# EAGLE board frontplatine_v0.2_140201 (EAGLE 6.3), part 1 of 2
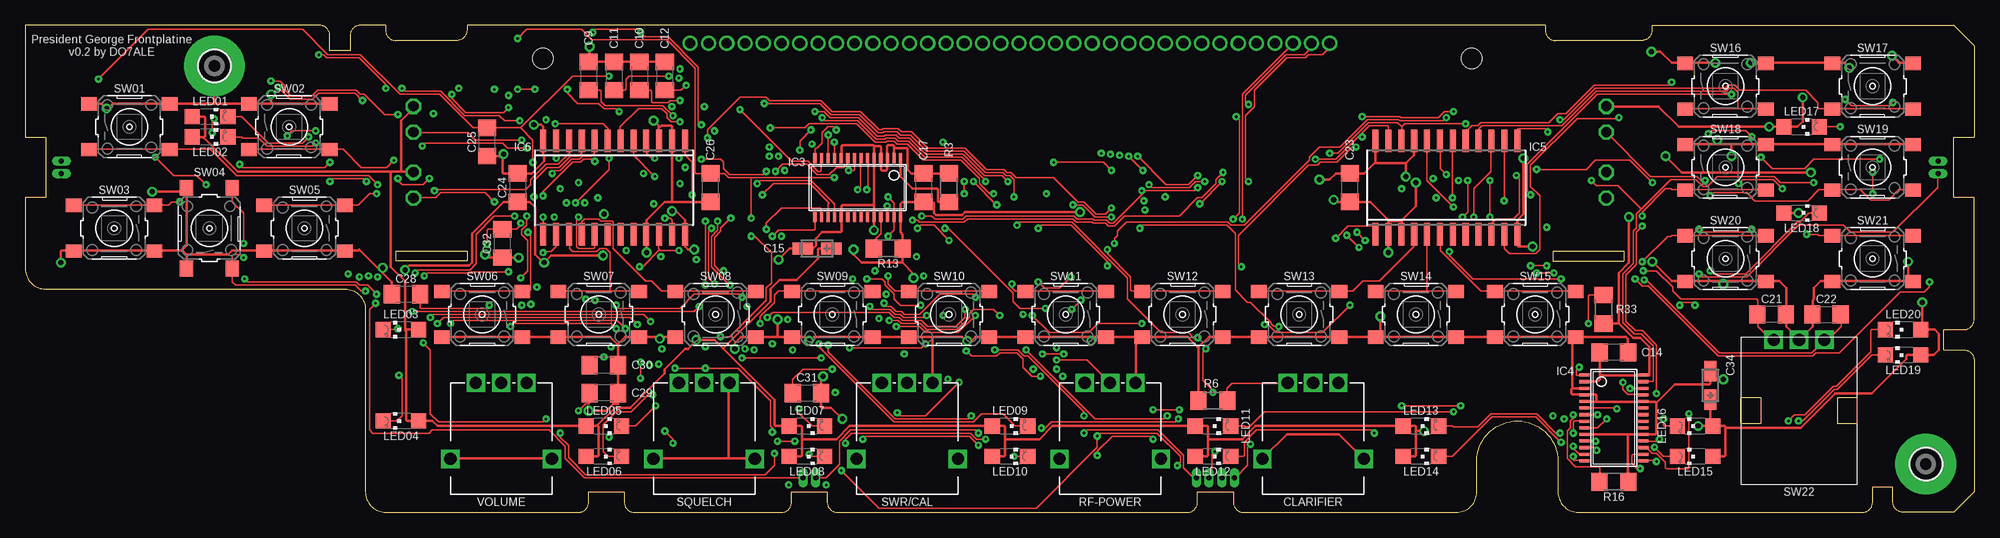
[diagram p0: board, top side]
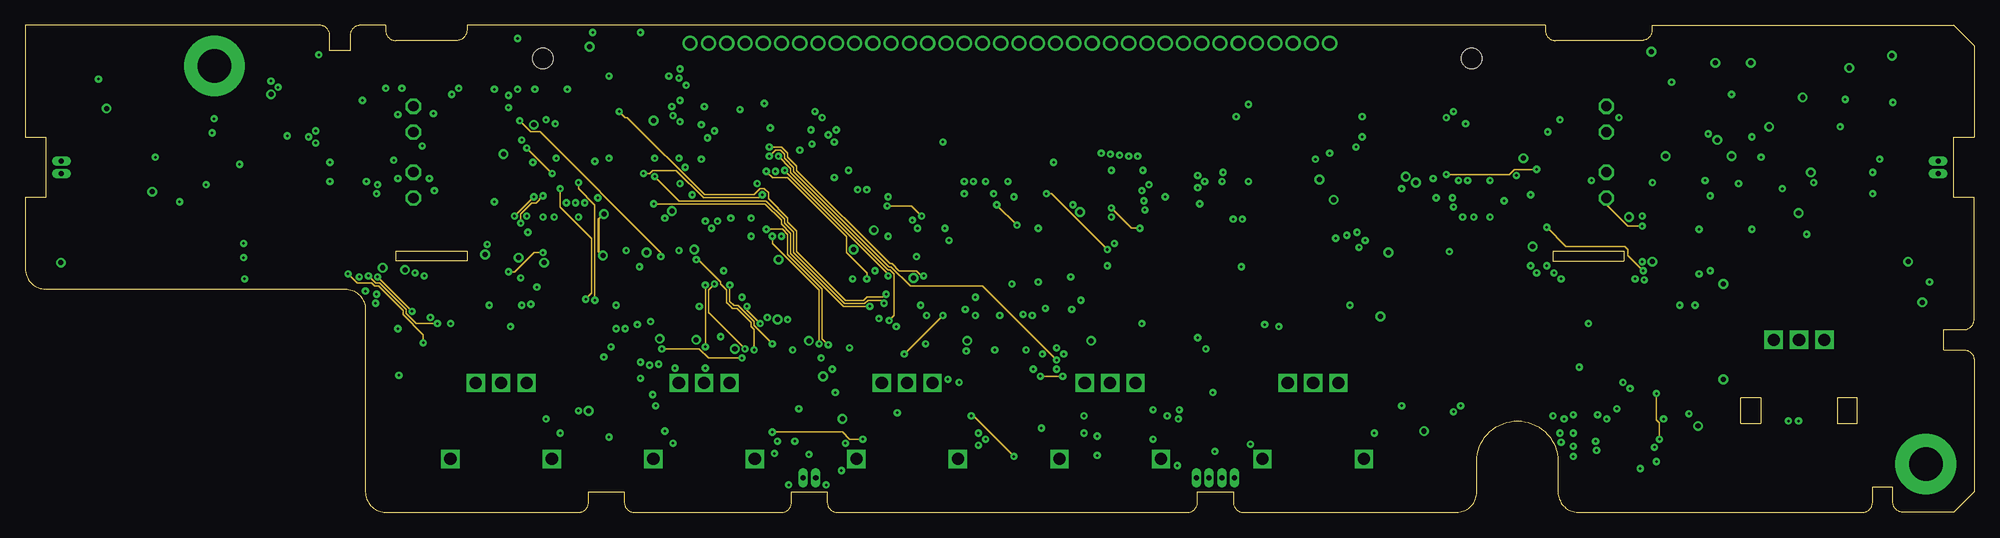
[diagram p1: board, inner layer Route2]
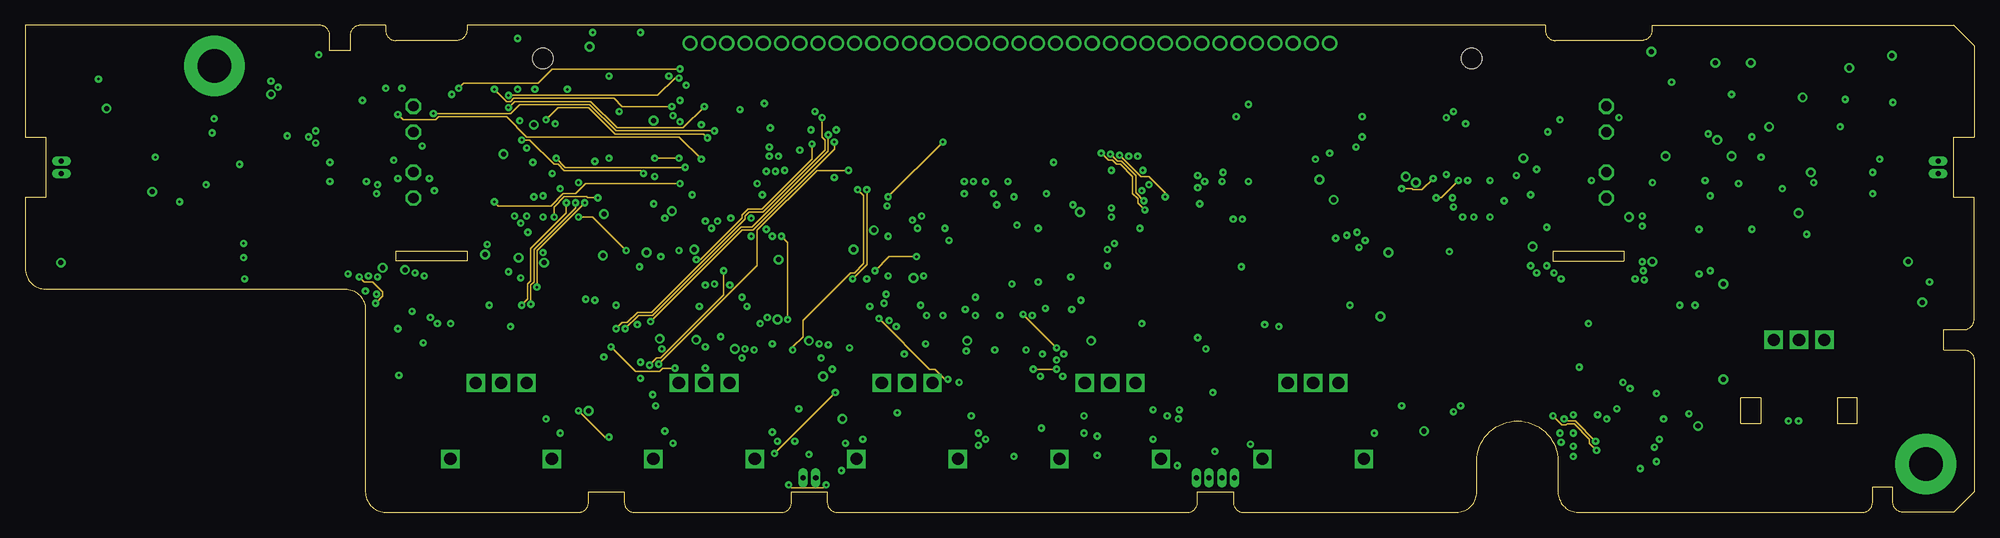
[diagram p2: board, inner layer Route3]
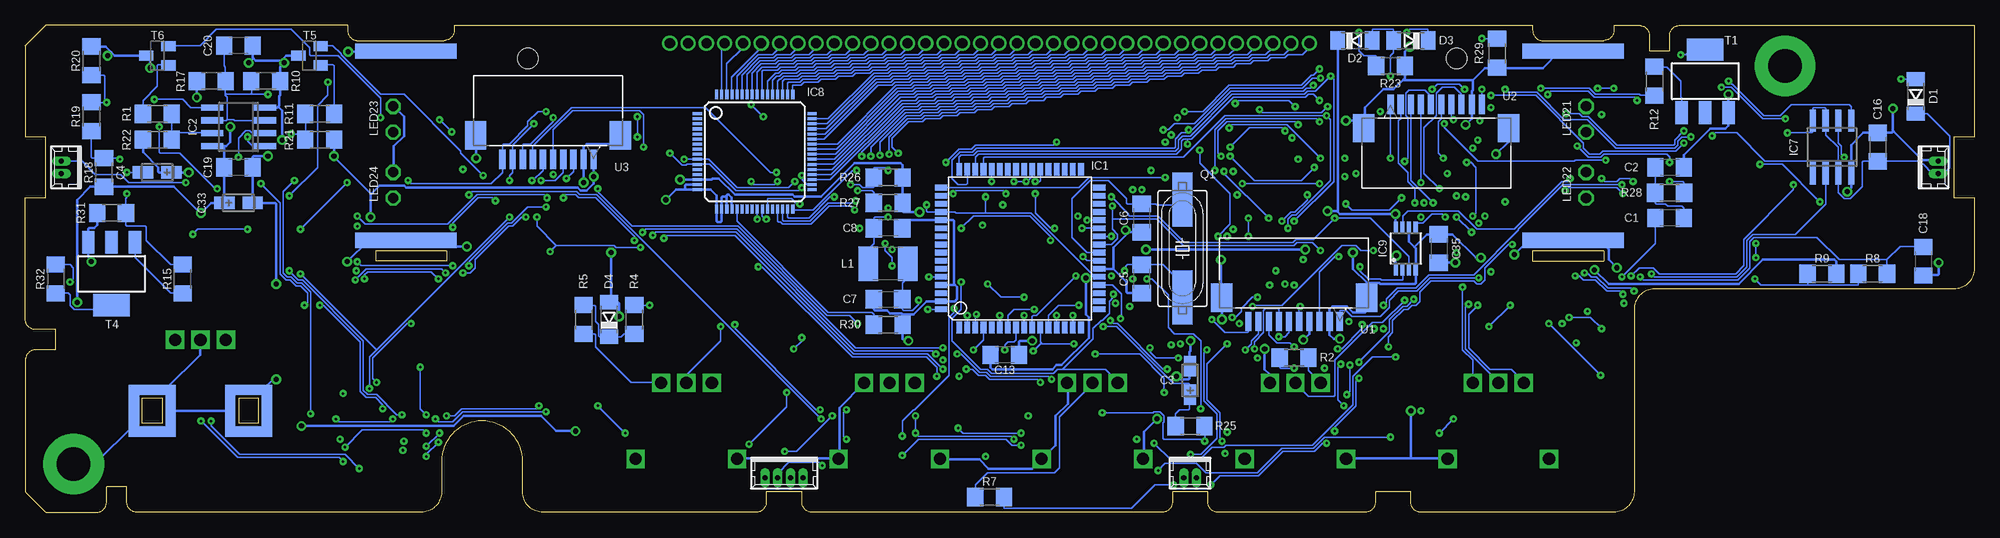
[diagram p3: board, bottom side, seen from below]

Size 192 x 48 mm. Coordinates in mm from the lower left corner, seen from the top.
Outline: 150.75,46.5 159.25,46.5 arc90 160.25,47.5 160.25,48
Outline: 43.5,48 149.75,48 149.75,47.5 arc90 150.76,46.5
Outline: 35.5,48 33,48 arc90 32,47 32,45.5 30,45.5 30,47 arc90 29,48 0,48 0,37 2,37 2,31 0,31 0,24 arc90 2,22 31.5,22 arc-90 33.5,20 33.5,2 arc90 35.5,0 54.5,0 arc90 55.5,1 55.5,2 59,2 59,1 arc90 60,0 74.5,0 arc90 75.5,1 75.5,2 79,2 79,1 arc90 80,0 114.5,0 arc90 115.5,1 115.5,2 119,2 119,1 arc90 120,0 141,0 arc90 143,2 143,5 arc-90 147,9 arc-90 151,5 151,2 arc90 153,0 181,0 arc90 182,1 182,2.5 184,2.5 184,1 arc90 185,0 190,0 192,2 192,15 arc90 191,16 189,16 189,18 191,18 arc90 192,19 192,31 190,31 190,37 192,37 192,46 190,48 160.25,48
Outline: 43.5,48 43.5,47.5 arc-90 42.5,46.5 36.5,46.5 arc-90 35.5,47.5 35.5,48
Copper layers (1*2+3*4+5*6+7*16): Top 0.035mm / dielectric 0.2mm / Route2 0.035mm / dielectric 0.15mm / Route3 0.035mm / dielectric 0.2mm / Route4 0.035mm / dielectric 0.15mm / Route5 0.035mm / dielectric 0.2mm / Route6 0.035mm / dielectric 0.15mm / Route7 0.035mm / dielectric 0.2mm / Bottom 0.035mm
Design rules "Eagle_WEdirekt_125_check": minimum track width 5mil, minimum drill 0.2mm, track to track 5mil, track to pad 5mil, pad to pad 7mil, via to via 5mil, smd to smd 7mil, copper to edge 12mil, drill to drill 24mil, minimum pad ring 9mil, minimum via ring 9mil, stop-mask expansion 2mil, vias tented up to drill 0mil, thermal gap 12mil
Net classes: 0 default: width 0.125 mm, drill 0.25 mm; 1 GND: width 0.25 mm, drill 0.5 mm; 2 SUPPLY LED: width 0.25 mm, drill 0.5 mm; 3 LCD: width 0.075 mm, drill 0.25 mm
tKeepout: area 184,8.5 to 187,11.5; area 160.5,11 to 163.5,14; area 163,0 to 166,3; area 37.5,3.5 to 40.5,6.5; area 149.5,11 to 152.5,14; area 92,11 to 95,14; area 36.5,11 to 39.5,14
bKeepout: area 147,18.5 to 151,24.5
tRestrict: area 190,37 to 192,40; area 73.5,0 to 81,2.3; area 53.5,0 to 61,2.3; area 113.5,0 to 121,2.3; area 0,37 to 2,40
bRestrict: area 190,37 to 192,40; area 73.5,0 to 81,2.3; area 53.5,0 to 61,2.3; area 113.5,0 to 121,2.3; area 0,37 to 2,40; area 136,8.5 to 140,14.5; area 125.5,15 to 129.5,21; area 106,2 to 110,8; area 86,2 to 90,8; area 56,8.5 to 60,14.5; area 46,2 to 50,8
vRestrict: area 190,37 to 192,40; area 73.5,0 to 81,2.3; area 53.5,0 to 61,2.3; area 113.5,0 to 121,2.3; area 0,37 to 2,40

## Footprints (pad centres in the part's own frame; a part is rotated, then mirrored left to right if it is on the bottom)
C1206 = smd 1.6 x 1.8: 1 -1.4,0; 2 1.4,0
CT3216 = smd 2 x 1.2: + -1.4,0; - 1.4,0
POTI = drill 1.2 square: 1 -2.5,-7.5; 2 0,-7.5; 3 2.5,-7.5; 4 -5,0; 5 5,0
SOD80C = smd 1.4 x 1.8: A 1.7,0; C -1.7,0
DISPLAY = drill 1 octagon: A1 1.73,15.27; A2 1.73,8.77; A3 119.27,15.27; A4 119.27,8.77; K1 1.73,12.73; K2 1.73,6.23; K3 119.27,12.73; K4 119.27,6.23 | drill 1: COM1 88.4,21.5; COM2 90.2,21.5; COM3 92,21.5; SEG01 29,21.5; SEG02 30.8,21.5; SEG03 32.6,21.5; SEG04 34.4,21.5; SEG05 36.2,21.5; SEG06 38,21.5; SEG07 39.8,21.5; SEG08 41.6,21.5; SEG09 43.4,21.5; SEG10 45.2,21.5; SEG11 47,21.5; SEG12 48.8,21.5; SEG13 50.6,21.5; SEG14 52.4,21.5; SEG15 54.2,21.5; SEG16 56,21.5; SEG17 57.8,21.5; SEG18 59.6,21.5; SEG19 61.4,21.5; SEG20 63.2,21.5; SEG21 65,21.5; SEG22 66.8,21.5; SEG23 68.6,21.5; SEG24 70.4,21.5; SEG25 72.2,21.5; SEG26 74,21.5; SEG27 75.8,21.5; SEG28 77.6,21.5; SEG29 79.4,21.5; SEG30 81.2,21.5; SEG31 83,21.5; SEG32 84.8,21.5; SEG33 86.6,21.5 | smd 10 x 1.5 bottom: GND@0 118,2.055; GND@3 3,2.055; GND@6 3,20.695; GND@7 118,20.695 | hole 2: 14.5,20; 106,20
TQFP64 = smd 1.194 x 0.559: 1 -7.8,6; 2 -7.8,5.2; 3 -7.8,4.4; 4 -7.8,3.6; 5 -7.8,2.8; 6 -7.8,2; 7 -7.8,1.2; 8 -7.8,0.4; 9 -7.8,-0.4; 10 -7.8,-1.2; 11 -7.8,-2; 12 -7.8,-2.8; 13 -7.8,-3.6; 14 -7.8,-4.4; 15 -7.8,-5.2; 16 -7.8,-6; 33 7.8,-6; 34 7.8,-5.2; 35 7.8,-4.4; 36 7.8,-3.6; 37 7.8,-2.8; 38 7.8,-2; 39 7.8,-1.2; 40 7.8,-0.4; 41 7.8,0.4; 42 7.8,1.2; 43 7.8,2; 44 7.8,2.8; 45 7.8,3.6; 46 7.8,4.4; 47 7.8,5.2; 48 7.8,6 | smd 0.559 x 1.194: 17 -6,-7.8; 18 -5.2,-7.8; 19 -4.4,-7.8; 20 -3.6,-7.8; 21 -2.8,-7.8; 22 -2,-7.8; 23 -1.2,-7.8; 24 -0.4,-7.8; 25 0.4,-7.8; 26 1.2,-7.8; 27 2,-7.8; 28 2.8,-7.8; 29 3.6,-7.8; 30 4.4,-7.8; 31 5.2,-7.8; 32 6,-7.8; 49 6,7.8; 50 5.2,7.8; 51 4.4,7.8; 52 3.6,7.8; 53 2.8,7.8; 54 2,7.8; 55 1.2,7.8; 56 0.4,7.8; 57 -0.4,7.8; 58 -1.2,7.8; 59 -2,7.8; 60 -2.8,7.8; 61 -3.6,7.8; 62 -4.4,7.8; 63 -5.2,7.8; 64 -6,7.8
SO08 = smd 0.6 x 2.2: 1 -1.905,-2.6; 2 -0.635,-2.6; 3 0.635,-2.6; 4 1.905,-2.6; 5 1.905,2.6; 6 0.635,2.6; 7 -0.635,2.6; 8 -1.905,2.6
TSSOP28 = smd 0.305 x 0.991: 1 -4.225,-2.918; 2 -3.575,-2.918; 3 -2.925,-2.918; 4 -2.275,-2.918; 5 -1.625,-2.918; 6 -0.975,-2.918; 7 -0.325,-2.918; 8 0.325,-2.918; 9 0.975,-2.918; 10 1.625,-2.918; 11 2.275,-2.918; 12 2.925,-2.918; 13 3.575,-2.918; 14 4.225,-2.918; 15 4.225,2.918; 16 3.575,2.918; 17 2.925,2.918; 18 2.275,2.918; 19 1.625,2.918; 20 0.975,2.918; 21 0.325,2.918; 22 -0.325,2.918; 23 -0.975,2.918; 24 -1.625,2.918; 25 -2.275,2.918; 26 -2.925,2.918; 27 -3.575,2.918; 28 -4.225,2.918
SO24 = smd 0.6 x 2.2: 1 -6.985,-4.6; 2 -5.715,-4.6; 3 -4.445,-4.6; 4 -3.175,-4.6; 5 -1.905,-4.6; 6 -0.635,-4.6; 7 0.635,-4.6; 8 1.905,-4.6; 9 3.175,-4.6; 10 4.445,-4.6; 11 5.715,-4.6; 12 6.985,-4.6; 13 6.985,4.6; 14 5.715,4.6; 15 4.445,4.6; 16 3.175,4.6; 17 1.905,4.6; 18 0.635,4.6; 19 -0.635,4.6; 20 -1.905,4.6; 21 -3.175,4.6; 22 -4.445,4.6; 23 -5.715,4.6; 24 -6.985,4.6
SO-08 = smd 0.6 x 2.2: 1 -1.905,-2.6; 2 -0.635,-2.6; 3 0.635,-2.6; 4 1.905,-2.6; 5 1.905,2.6; 6 0.635,2.6; 7 -0.635,2.6; 8 -1.905,2.6
LQFP-ST-64-2 = smd 0.9 x 0.3: 1 -5.65,3.75; 2 -5.65,3.25; 3 -5.65,2.75; 4 -5.65,2.25; 5 -5.65,1.75; 6 -5.65,1.25; 7 -5.65,0.75; 8 -5.65,0.25; 9 -5.65,-0.25; 10 -5.65,-0.75; 11 -5.65,-1.25; 12 -5.65,-1.75; 13 -5.65,-2.25; 14 -5.65,-2.75; 15 -5.65,-3.25; 16 -5.65,-3.75; 33 5.65,-3.75; 34 5.65,-3.25; 35 5.65,-2.75; 36 5.65,-2.25; 37 5.65,-1.75; 38 5.65,-1.25; 39 5.65,-0.75; 40 5.65,-0.25; 41 5.65,0.25; 42 5.65,0.75; 43 5.65,1.25; 44 5.65,1.75; 45 5.65,2.25; 46 5.65,2.75; 47 5.65,3.25; 48 5.65,3.75 | smd 0.3 x 0.9: 17 -3.75,-5.65; 18 -3.25,-5.65; 19 -2.75,-5.65; 20 -2.25,-5.65; 21 -1.75,-5.65; 22 -1.25,-5.65; 23 -0.75,-5.65; 24 -0.25,-5.65; 25 0.25,-5.65; 26 0.75,-5.65; 27 1.25,-5.65; 28 1.75,-5.65; 29 2.25,-5.65; 30 2.75,-5.65; 31 3.25,-5.65; 32 3.75,-5.65; 49 3.75,5.65; 50 3.25,5.65; 51 2.75,5.65; 52 2.25,5.65; 53 1.75,5.65; 54 1.25,5.65; 55 0.75,5.65; 56 0.25,5.65; 57 -0.25,5.65; 58 -0.75,5.65; 59 -1.25,5.65; 60 -1.75,5.65; 61 -2.25,5.65; 62 -2.75,5.65; 63 -3.25,5.65; 64 -3.75,5.65
MSOP8 = smd 0.4 x 1.2: 1 -0.975,-2.05; 2 -0.325,-2.05; 3 0.325,-2.05; 4 0.975,-2.05; 5 0.975,2.05; 6 0.325,2.05; 7 -0.325,2.05; 8 -0.975,2.05
L1812 = smd 1.9 x 3.4: 1 -1.95,0; 2 1.95,0
CHIPLED_1206 = smd 1.5 x 1.5: A 0,-1.75; C 0,1.75
LOCH = drill 3.3 pad 6: B3,0 0,0
HC49UP = smd 5.334 x 1.93: 1 -4.826,0; 2 4.826,0
R1206 = smd 1.6 x 1.803: 1 -1.422,0; 2 1.422,0
TASTER = smd 1.55 x 1.3: 1 -3.975,2.25; 2 3.975,2.25; 3 -3.975,-2.25; 4 3.975,-2.25
ROTARY_SWITCH = drill 1.2 square: A -2.5,-7; B 2.5,-7; C 0,-7 | smd 1 x 5.11 bottom: GND@1 -6.555,0; GND@2 -2.945,0; GND@3 6.555,0; GND@4 2.945,0 | smd 2.61 x 1 bottom: GND@5 -4.75,2.055; GND@6 -4.75,-2.055; GND@7 4.75,2.055; GND@8 4.75,-2.055
SOT223 = smd 1.219 x 2.235: 1 -2.311,-3.099; 2 0,-3.099; 3 2.311,-3.099 | smd 3.6 x 2.2: 4 0,3.099
SOT23-BEC = smd 1 x 1.4: B -0.95,-1.1; C 0,1.1; E 0.95,-1.1
MOLEX_52207-1085 = smd 0.61 x 1.905: 1 4.496,4.801; 2 3.505,4.801; 3 2.489,4.801; 4 1.499,4.801; 5 0.508,4.801; 6 -0.508,4.801; 7 -1.499,4.801; 8 -2.489,4.801; 9 -3.505,4.801; 10 -4.496,4.801 | smd 2.108 x 2.794: 11 -7.137,7.137; 12 7.137,7.137
53047-02 = drill 0.5 pad 0.698 long: 1 0.625,0.45; 2 -0.625,0.45
53047-04 = drill 0.5 pad 0.698 long: 1 1.875,0.45; 2 0.625,0.45; 3 -0.625,0.45; 4 -1.875,0.45

## Placement (x,y rotation side)
C1  0,047µF  [C1206]  30,29 180 bottom
C2  0,022µF  [C1206]  30,34 180 bottom
C3  22µF  [CT3216]  77.25,13 90 bottom
C4  10µF  [CT3216]  179,33.5 180 bottom
C5  22pF  [C1206]  82,23 90 bottom
C6  22pF  [C1206]  82,29 90 bottom
C7  100nF  [C1206]  107,21 0 bottom
C8  100nF  [C1206]  107,28 180 bottom
C9  1nF  [C1206]  55.5,43 270 top
C10  1nF  [C1206]  60.5,43 270 top
C11  1nF  [C1206]  58,43 270 top
C12  1nF  [C1206]  63,43 270 top
C13  100nF  [C1206]  95.5,15.5 180 bottom
C14  100nF  [C1206]  156.5,15.75 180 top
C15  22µF  [CT3216]  78,26 180 top
C16  100nF  [C1206]  9.5,36 270 bottom
C17  100nF  [C1206]  88.5,32 270 top
C18  1nF  [C1206]  5,24.75 270 bottom
C19  100nF  [C1206]  171,34 180 bottom
C20  1nF  [C1206]  171,46 180 bottom
C21  1µF  [C1206]  172.05,19.5 180 top
C22  1µF  [C1206]  177.45,19.5 0 top
C23  100nF  [C1206]  130.5,32 90 top
C24  100nF  [C1206]  48.5,32 270 top
C25  1nF  [C1206]  45.5,36.5 90 top
C26  1nF  [C1206]  67.5,32 90 top
C28  1nF  [C1206]  37.5,21.5 0 top
C29  1nF  [C1206]  57,11.75 180 top
C30  1nF  [C1206]  57,14.5 0 top
C31  1nF  [C1206]  77,11.75 0 top
C32  1nF  [C1206]  47,26.5 90 top
C33  22µF  [CT3216]  171,30.5 0 bottom
C34  22µF  [CT3216]  166,12.5 90 top
C35  100nF  [C1206]  52.75,26 270 bottom
CLARIFIER  POTI  [POTI]  126.88,5.25 180 top
D1  RLS4148  [SOD80C]  5.75,41 90 bottom
D2  RLS4148  [SOD80C]  61,46.5 0 bottom
D3  RLS4148  [SOD80C]  55.5,46.5 180 bottom
D4  RLZTE-115.1B  [SOD80C]  134.5,19 90 bottom
DISPLAY1  DISPLAY  [DISPLAY]  36.5,24.75 0 top
IC1  MEGA128-A  [TQFP64]  94,26 90 bottom
IC2  LM393D  [SO08]  171,38 90 bottom
IC3  TLC59116  [TSSOP28]  82,32 180 top
IC4  TLC59116  [TSSOP28]  156.5,9.3 270 top
IC5  PCA9555D  [SO24]  140,32 0 top
IC6  PCA9555D  [SO24]  58,32 180 top
IC7  25LC080SN  [SO-08]  14,36 0 bottom
IC8  PCF8576  [LQFP-ST-64-2]  120.14,35.54 0 bottom
IC9  ISL95811UFUZ  [MSOP8]  56,26 0 bottom
L1  10µH  [L1812]  107,24.5 180 bottom
LED01  G  [CHIPLED_1206]  18.2,39 270 top
LED02  R  [CHIPLED_1206]  18.2,37 270 top
LED03  G  [CHIPLED_1206]  37,18 90 top
LED04  R  [CHIPLED_1206]  37,9 90 top
LED05  G  [CHIPLED_1206]  57,8.5 270 top
LED06  R  [CHIPLED_1206]  57,5.5 270 top
LED07  G  [CHIPLED_1206]  77,8.5 270 top
LED08  R  [CHIPLED_1206]  77,5.5 270 top
LED09  G  [CHIPLED_1206]  97,8.5 270 top
LED10  R  [CHIPLED_1206]  97,5.5 270 top
LED11  G  [CHIPLED_1206]  117,8.5 270 top
LED12  R  [CHIPLED_1206]  117,5.5 270 top
LED13  G  [CHIPLED_1206]  137.5,8.5 270 top
LED14  R  [CHIPLED_1206]  137.5,5.5 270 top
LED15  G  [CHIPLED_1206]  164.5,5.5 90 top
LED16  R  [CHIPLED_1206]  164.5,8.5 90 top
LED17  G  [CHIPLED_1206]  175,38 270 top
LED18  R  [CHIPLED_1206]  175,29.5 270 top
LED19  G  [CHIPLED_1206]  185,15.5 90 top
LED20  R  [CHIPLED_1206]  185,18 90 top
LOCH1  LOCH  [LOCH]  18.62,44 0 top
LOCH2  LOCH  [LOCH]  187.25,4.75 0 top
Q1  Farnell: 1640903RL  [HC49UP]  78,26 90 bottom
R1  3,3k  [R1206]  179,39.27 0 bottom
R2  4,7k  [R1206]  67,15.25 180 bottom
R3  1k  [R1206]  91,32 270 top
R4  220  [R1206]  132,19 90 bottom
R5  4,7k  [R1206]  137,19 90 bottom
R6  33k  [R1206]  117,11 180 top
R7  1k  [R1206]  97,1.5 0 bottom
R8  1k  [R1206]  10,23.5 0 bottom
R9  47k  [R1206]  15,23.5 180 bottom
R10  220k  [R1206]  168.32,42.5 180 bottom
R11  3,3k  [R1206]  163,39.27 180 bottom
R12  3,3k  [R1206]  31.5,42.5 90 bottom
R13  10k  [R1206]  85,26 180 top
R15  47k  [R1206]  176.5,23 90 bottom
R16  1k  [R1206]  156.5,3 180 top
R17  220k  [R1206]  173.68,42.5 180 bottom
R18  10k  [R1206]  184.25,33.5 270 bottom
R19  1k  [R1206]  185.5,39 270 bottom
R20  10k  [R1206]  185.5,44.5 270 bottom
R21  3,3k  [R1206]  163,36.73 180 bottom
R22  3,3k  [R1206]  179,36.73 0 bottom
R23  220  [R1206]  57.5,44 180 bottom
R25  470  [R1206]  77.25,8.5 0 bottom
R26  10k  [R1206]  107,33 0 bottom
R27  10k  [R1206]  107,30.5 0 bottom
R28  50k  [R1206]  30,31.5 180 bottom
R29  47k  [R1206]  47,45.25 90 bottom
R30  0  [R1206]  107,18.5 180 bottom
R31  1M  [R1206]  183.5,29.5 180 bottom
R32  10k  [R1206]  189,23 270 bottom
R33  10k  [R1206]  155.5,20 90 top
RF-POWER  POTI  [POTI]  106.88,5.25 180 top
SQUELCH  POTI  [POTI]  66.88,5.25 180 top
SW01  [TASTER]  10.25,38 0 top
SW02  [TASTER]  26,38 0 top
SW03  [TASTER]  8.75,28 180 top
SW04  [TASTER]  18.12,28 90 top
SW05  [TASTER]  27.5,28 180 top
SW06  [TASTER]  45,19.5 180 top
SW07  [TASTER]  56.5,19.5 180 top
SW08  [TASTER]  68,19.5 180 top
SW09  [TASTER]  79.5,19.5 180 top
SW10  [TASTER]  91,19.5 180 top
SW11  [TASTER]  102.5,19.5 180 top
SW12  [TASTER]  114,19.5 180 top
SW13  [TASTER]  125.5,19.5 180 top
SW14  [TASTER]  137,19.5 180 top
SW15  [TASTER]  148.75,19.5 180 top
SW16  [TASTER]  167.5,42 0 top
SW17  [TASTER]  182,42 0 top
SW18  [TASTER]  167.5,34 0 top
SW19  [TASTER]  182,34 0 top
SW20  [TASTER]  167.5,25 180 top
SW21  [TASTER]  182,25 180 top
SW22  ROTARY_SWITCH  [ROTARY_SWITCH]  174.75,10 180 top
SWR/CAL  POTI  [POTI]  86.88,5.25 180 top
T1  PZT2222A  [SOT223]  26.5,42.5 0 bottom
T4  PZT2222A  [SOT223]  183.5,23.5 180 bottom
T5  BCX19SMD  [SOT23-BEC]  164,45 90 bottom
T6  BCX19SMD  [SOT23-BEC]  179,45 90 bottom
U1  52207-1085  [MOLEX_52207-1085]  67,14 0 bottom
U2  52207-1085  [MOLEX_52207-1085]  53,45 180 bottom
U3  52207-1085  [MOLEX_52207-1085]  140.5,30 0 bottom
VOLUME  POTI  [POTI]  46.88,5.25 180 top
X2  Goldcap  [53047-02]  4,34 270 bottom
X3  I/O  [53047-04]  117.25,3.85 180 bottom
X4  I2C  [53047-02]  188,34 90 bottom
X5  PTT/+-  [53047-02]  77.25,3.85 180 bottom

## Library data of the parts
C1 C3 C4 C15 C33 C34 L1 R3 R16 = rcl
C2 C5-C14 C16-C26 C28-C32 C35 R1 R2 R4-R13 R15 R17-R23 R25-R33 = resistor
CLARIFIER DISPLAY1 IC9 LOCH1 LOCH2 RF-POWER SQUELCH SW01-SW09 SW10-SW22 SWR/CAL VOLUME = president_george
D1-D4 = diode
IC1 = atmel; MPN: ATMEGA128-16AU; OC_FARNELL: 9171118; OC_NEWARK: 95K7364
IC2 = linear
IC3 IC4 = tlc
IC5 IC6 = micro-philips; MPN: PCA9555DW; OC_FARNELL: 1408295; OC_NEWARK: 63K6067
IC7 = microchip; MF: MICROCHIP; MPN: 25LC080/SN; OC_FARNELL: 1137302; OC_NEWARK: 96K4092
IC8 = pcf8576
LED01-LED09 LED10-LED20 = led
Q1 = crystal; OC_FARNELL: unknown; OC_NEWARK: unknown
T1 T4 = transistor-neu-to92
T5 T6 = transistor-npn
U1-U3 = Molex_By_element14_Batch_1; MPN: 52207-1085; OC_FARNELL: 1079938; OC_NEWARK: 58J9503; PACKAGE: SOCKET FPC, SMT, 1MM, 10 WAY; SUPPLIER: Molex
X2 X4 X5 = con-molex; MF: MOLEX; MPN: 53047-0210; OC_FARNELL: 9733051; OC_NEWARK: 57H4701
X3 = con-molex; MF: WALDOM/MOLEX; MPN: 53047-0410; OC_FARNELL: 9733060; OC_NEWARK: 38C9900

## Nets
GND [GND]: C2.1 C3.- C5.1 C6.1 C7.1 C8.1 C9.1 C10.1 C11.1 C12.1 C13.1 C14.1 C15.- C16.1 C17.1 C18.2 C19.1 C20.1 C21.1 C22.1 C23.1 C24.1 C25.1 C26.1 C28.1 C29.1 C30.2 C31.2 C32.1 C33.- C34.- C35.1 CLARIFIER.4 CLARIFIER.5 D4.A DISPLAY1.GND@0 DISPLAY1.GND@3 DISPLAY1.GND@6 DISPLAY1.GND@7 IC1.22 IC1.53 IC1.61 IC1.63 IC2.4 IC3.2 IC3.3 IC3.4 IC3.5 IC3.10 IC3.19 IC3.24 IC4.3 IC4.4 IC4.5 IC4.10 IC4.19 IC4.24 IC5.2 IC5.3 IC5.12 IC6.2 IC6.3 IC6.12 IC6.21 IC7.4 IC8.15 IC8.16 IC8.17 IC8.18 IC8.19 IC8.20 IC9.4 IC9.6 LOCH1.B3,0 LOCH2.B3,0 R3.1 R6.2 R10.1 R16.1 R20.1 R23.1 R29.1 R30.1 R31.2 RF-POWER.1 RF-POWER.4 RF-POWER.5 SQUELCH.1 SQUELCH.4 SQUELCH.5 SW01.1 SW01.2 SW02.1 SW02.2 SW03.1 SW03.2 SW04.1 SW04.2 SW05.1 SW05.2 SW06.1 SW06.2 SW07.1 SW07.2 SW08.1 SW08.2 SW09.1 SW09.2 SW10.1 SW10.2 SW11.1 SW11.2 SW12.1 SW12.2 SW13.1 SW13.2 SW14.1 SW14.2 SW15.1 SW15.2 SW16.1 SW16.2 SW17.1 SW17.2 SW18.1 SW18.2 SW19.1 SW19.2 SW20.1 SW20.2 SW21.1 SW21.2 SW22.C SW22.GND@1 SW22.GND@2 SW22.GND@3 SW22.GND@4 SW22.GND@5 SW22.GND@6 SW22.GND@7 SW22.GND@8 SWR/CAL.1 SWR/CAL.4 SWR/CAL.5 T1.3 T4.3 T5.C T6.C U1.2 U1.11 U1.12 U2.9 U2.11 U2.12 U3.2 U3.11 U3.12 VOLUME.4 VOLUME.5 X2.2
N$1: DISPLAY1.SEG01 IC8.29
N$2: U2.1 VOLUME.2
N$3: U2.2 VOLUME.1
N$4: U2.3 VOLUME.3
N$5: D4.C R4.1 R5.2
N$6: SQUELCH.2 U2.4
N$7: R2.1 SQUELCH.3
N$8: C32.2 R2.2 R4.2 U2.5
N$9: RF-POWER.2 U2.6
N$10: CLARIFIER.1 R5.1
N$11: CLARIFIER.2 U2.7
N$12: CLARIFIER.3 R6.1
N$13: IC3.6 LED07.C
N$14: R7.2 U2.8
N$15: R7.1 SWR/CAL.2
N$16: DISPLAY1.SEG02 IC8.30
N$17: IC6.14 R8.1 R9.2
N$18: C18.1 R8.2 X5.2
N$19: IC6.10 SW05.3 SW05.4
N$20: T1.4 U1.3
N$21: DISPLAY1.SEG03 IC8.31
N$22: DISPLAY1.SEG04 IC8.32
N$23: IC3.7 LED08.C
N$24: R12.2 T1.1
N$25: C30.1 IC1.8 X3.4
N$26: DISPLAY1.SEG05 IC8.34
N$27: C6.2 IC1.24 Q1.2
N$28: R32.2 T4.4
N$29: DISPLAY1.SEG06 IC8.35
N$30 [LCD]: DISPLAY1.COM1 IC8.25
N$31: C5.2 IC1.23 Q1.1
N$32: IC5.20 SW20.3 SW20.4
N$33: IC3.9 LED06.C
N$34: IC3.12 LED04.C
N$35: IC3.14 LED02.C
N$36: IC3.16 LED10.C
N$37: IC4.6 LED17.C
N$38: IC3.15 LED09.C
N$39: IC3.13 LED01.C
N$40: IC3.11 LED03.C
N$41: IC3.8 LED05.C
N$42: C20.2 IC2.3 IC2.6 R10.2 R17.1 X5.1
N$43 [SUPPLY LED]: IC3.1 R3.2
N$44: IC3.25 R13.2
N$45: DISPLAY1.COM2 IC8.26
N$46: IC4.25 R33.2
N$47: IC4.1 R16.2
N$48: DISPLAY1.COM3 IC8.27
N$49: IC4.7 LED18.C
N$50 [SUPPLY LED]: C15.+ C19.2 C33.+ C34.+ DISPLAY1.A1 DISPLAY1.A2 DISPLAY1.A3 DISPLAY1.A4 IC2.8 LED01.A LED02.A LED03.A LED04.A LED05.A LED06.A LED07.A LED08.A LED09.A LED10.A LED11.A LED12.A LED13.A LED14.A LED15.A LED16.A LED17.A LED18.A LED19.A LED20.A R17.2 R18.2 U1.4
N$51: IC4.8 LED15.C
N$52: DISPLAY1.SEG07 IC8.36
N$53: DISPLAY1.SEG08 IC8.37
N$54: DISPLAY1.SEG09 IC8.38
N$55: C21.2 IC5.14 SW22.B
N$56: IC1.60 SWR/CAL.3 U2.10
N$57: IC6.9 SW04.3 SW04.4
N$58: IC6.8 SW03.3 SW03.4
N$59: IC6.7 SW02.3 SW02.4
N$60: IC6.6 SW10.3 SW10.4
N$61: IC6.5 SW11.3 SW11.4
N$62: IC6.4 SW12.3 SW12.4
N$63: C22.2 IC5.15 SW22.A
N$64: IC6.15 SW07.3 SW07.4
N$65: IC6.16 SW08.3 SW08.4
N$66: IC6.17 SW09.3 SW09.4
N$67: IC5.4 SW13.3 SW13.4
N$68: IC1.4 X3.3
N$69: C28.2 IC1.39 X3.1
N$70: C29.2 IC1.38 X3.2
N$71: IC5.19 SW21.3 SW21.4
N$72: IC5.16 SW16.3 SW16.4
N$73: IC5.18 SW18.3 SW18.4
N$74: IC8.21 R30.2
N$75: IC1.7 SW01.3 SW01.4
N$76: DISPLAY1.SEG10 IC8.39
N$77: DISPLAY1.SEG11 IC8.40
N$78: DISPLAY1.SEG12 IC8.41
N$79: DISPLAY1.SEG13 IC8.42
N$80: DISPLAY1.SEG14 IC8.43
N$81: DISPLAY1.SEG15 IC8.44
N$82: DISPLAY1.SEG16 IC8.45
N$83: DISPLAY1.SEG17 IC8.46
N$84: DISPLAY1.SEG18 IC8.47
N$85: DISPLAY1.SEG19 IC8.49
N$86: DISPLAY1.SEG20 IC8.50
N$87: DISPLAY1.SEG21 IC8.51
N$88: DISPLAY1.SEG22 IC8.52
N$89: DISPLAY1.SEG23 IC8.53
N$90: DISPLAY1.SEG24 IC8.54
N$91: DISPLAY1.SEG25 IC8.55
N$92: DISPLAY1.SEG26 IC8.56
N$93: DISPLAY1.SEG27 IC8.57
N$94: DISPLAY1.SEG28 IC8.58
N$95: DISPLAY1.SEG29 IC8.59
N$96: DISPLAY1.SEG30 IC8.60
N$97: DISPLAY1.SEG31 IC8.61
N$98: DISPLAY1.SEG32 IC8.62
N$99: DISPLAY1.SEG33 IC8.63
N$100: IC1.44 R12.1
N$101: C9.2 IC1.45 U1.7
N$102: C10.2 IC1.46 U1.9
N$103: C12.2 IC1.47 U1.10
N$104: C11.2 IC1.48 U1.8
N$105: IC1.15 IC9.5
N$106: C26.2 IC1.49 R29.2 U1.6
N$107: C3.+ IC1.9 R25.1
N$108: IC4.9 LED16.C
N$109: IC1.10 IC7.1
N$110: IC4.11 LED11.C
N$111: C31.1 D3.C IC1.6 R23.2
N$112: C25.2 D1.A D2.A D3.A U1.1
N$113: IC1.13 IC7.2
N$114: IC1.12 IC7.5
N$116: IC2.5 R19.1 R20.2
N$117: IC2.2 R18.1 R19.2
N$118: IC5.17 SW19.3 SW19.4
N$119: IC2.1 R11.2 R21.2
N$120: IC2.7 R1.2 R22.2
N$121: DISPLAY1.K1 IC3.17
N$122: IC5.10 T5.E
N$123: IC5.6 SW15.3 SW15.4
N$124: IC5.11 T6.E
N$125: C1.2 U1.5
N$126: C1.1 C2.2 R28.2
N$128: IC9.7 R28.1
N$133: R11.1 T5.B
N$135: C4.- R15.2 R31.1
N$136: R15.1 T4.1
N$137: IC6.13 SW06.3 SW06.4
N$138: R1.1 T6.B
N$139: C7.2 IC1.64 L1.1
N$140: IC5.5 SW14.3 SW14.4
N$141: IC5.13 SW17.3 SW17.4
N$142: IC5.1 IC6.1 R25.2
N$143: IC4.12 LED12.C
N$144: IC4.13 LED13.C
N$145: IC4.14 LED14.C
N$146: IC4.15 LED19.C
N$147: IC4.16 LED20.C
N$148: DISPLAY1.K2 IC3.18
N$149: DISPLAY1.K3 IC4.17
N$150: DISPLAY1.K4 IC4.18
PDI: IC1.2 U3.3
PDO: IC1.3 U3.4
RST: IC1.20 R32.1 U3.6
RXD: IC1.27 U3.8
SCK: IC1.11 IC7.6 U3.5
SCL: IC1.25 IC3.26 IC4.26 IC5.22 IC6.22 IC8.11 IC9.2 R27.1 U3.9 X4.2
SDA: IC1.26 IC3.27 IC4.27 IC5.23 IC6.23 IC8.10 IC9.3 R26.1 U3.10 X4.1
TXD: IC1.28 U3.7
VCC [GND]: C4.+ C13.2 C14.2 C17.2 C23.2 C24.2 C35.2 D2.C IC3.28 IC4.2 IC4.28 IC5.21 IC5.24 IC6.24 IC8.14 IC9.1 IC9.8 R9.1 R13.1 R21.1 R22.1 R26.2 R27.2 R33.1 U3.1
VCCMEM: C8.2 C16.2 D1.C IC1.21 IC1.52 IC7.3 IC7.7 IC7.8 L1.2 X2.1

## Tracks (layer width: path | path; a pad name or v marks a point on that pad's centre or on a via)
GND  (via drill 0.5)
  Top 0.25: 18.6,40.3 22,40.3 SW02.1 22.1,40.3 24.2,40.3 | 18.6,40.3 14.3,40.3 SW01.2 14.2,40.3 8.6,40.3 8.1,39.8 v8,39.8 7.5,40.3 6.3,40.3 SW01.1 | 24.2,40.3 29.9,40.3 SW02.2 | 24.2,40.3 v24.2,41.2 | 18.6,40.3 18.6,44 LOCH1.B3,0 | C28.1 36.1,22.7 34.95,23.85 | 34.95,23.85 32.9,25.9 32.8,25.8 31.5,25.8 SW05.1 31.4,25.8 23.6,25.8 SW05.2 23.5,25.8 20.4,25.8 20,25.4 15.9,25.4 | v3.5,24.6 3.5,25.7 3.6,25.8 4.7,25.8 SW03.2 4.8,25.8 12.7,25.8 SW03.1 12.8,25.8 15.5,25.8 | 15.9,25.4 15.5,25.8 | 15.9,25.4 15.9,24.1 SW04.1 | 15.5,25.8 15.5,25.9 15.9,26.3 15.9,31.9 SW04.2 15.8,31.6 v12.5,31.6 | 34.95,23.85 v35.2,24.1 | C25.1 46.7,35.1 46.8,35 | 46.8,35 47,34.8 47,33.5 47.1,33.4 C24.1 49.9,33.4 51.1,34.6 51.1,35.1 51,35.2 IC6.12 51,36.7 51,38 50.8,38.2 v50.1,38.2 | 46.8,35 v47.1,35.3 | C12.1 C10.1 C11.1 C9.1 55.6,44.5 v55.6,45.9 | 62.4,37.8 62.4,36.6 IC6.3 | 62.4,37.8 62.7,38.1 63.6,38.1 63.7,38 63.7,36.6 IC6.2 63.7,36.5 63.7,30.6 | 63.7,30.6 63,30.6 61.2,28.8 61.2,27.4 IC6.21 61.2,27.3 v61.2,25.6 | 63.7,30.6 C26.1 | v61.9,38.6 62.4,38.1 62.4,37.8 | SW06.2 41.1,17.3 48.9,17.3 SW06.1 49,17.3 52.5,17.3 SW07.2 52.6,17.3 57.6,17.3 58.3,16.6 58.4,16.6 | 62.5,17.3 64,17.3 SW08.2 | 62.5,17.3 60.5,17.3 SW07.1 60.4,17.3 59.1,17.3 58.4,16.6 | 58.4,16.6 C30.2 C29.1 58.4,10.7 57.9,10.7 57.2,10 v55.5,10 | v48.6,25.1 C32.1 45.6,25.1 v45.3,25.4 | v62.5,17.1 62.5,17.3 | VOLUME.5 41.9,5.3 51.8,5.3 VOLUME.4 | 69.3,5.3 71.8,5.3 SQUELCH.4 | 69.3,5.3 61.9,5.3 SQUELCH.5 | 89.4,17.3 92.3,17.3 92.7,16.9 v92.8,16.9 93.2,16.9 93.6,17.3 94.9,17.3 SW10.1 95,17.3 98.5,17.3 SW11.2 98.6,17.3 105.2,17.3 v105,16.9 105,17 105.3,17.3 106.4,17.3 SW11.1 106.5,17.3 110,17.3 SW12.2
  Top 0.25: 89.4,17.3 87.1,17.3 SW10.2 87,17.3 83.5,17.3 SW09.1 83.4,17.3 77.7,17.3 77.3,16.9 v77.2,16.9 76.8,17.3 75.6,17.3 SW09.2 75.5,17.3 74.1,17.3 | 89.4,17.3 89.4,12.8 SWR/CAL.1 | R3.1 91,33.4 C17.1 87.3,33.4 86.9,33.8 86.9,35.8 86.8,35.9 85.6,35.9 | 85.6,35.9 85.6,36.1 85.5,36.2 85,36.2 84.9,36.1 84.9,35 IC3.3 84.9,34.9 84.9,33.8 84.8,33.7 84.4,33.7 84.3,33.8 84.3,34.9 IC3.4 84.3,35 84.3,36 84.2,36.1 83.6,36.1 | 85.6,35.9 85.6,35 IC3.2 | 83.6,36.1 83.5,36.2 80.5,36.2 80.4,36.1 80.4,35 IC3.10 | 83.6,36.1 83.6,35 IC3.5 83.6,34.8 83.6,30.3 83.5,30.3 | 83.5,30.3 80.5,30.3 80.4,30.2 80.4,29.1 IC3.19 80.4,29 80.4,27.7 80.3,27.6 78.5,27.6 77.9,27 77.9,26.3 77.6,26 C15.- 75.3,26 v74.2,24.9 | 83.5,30.3 83.6,30.2 83.6,29.1 IC3.24 83.6,29 v83.6,27.8 | 74.1,17.3 72,17.3 SW08.1 71.9,17.3 70.5,17.3 69.9,16.7 v69.9,16.1 | v78.6,13.4 78.4,13.2 C31.2 78.4,10.4 78.5,10.3 79.4,10.3 v80.5,9.2 | 74.1,17.3 v74.1,19 | 69.3,5.3 69.3,12.7 SQUELCH.1 | 168.1,36.3 171.4,36.3 SW18.2 171.5,36.3 178,36.3 SW19.1 178.1,36.3 185.9,36.3 SW19.2 | 168.1,36.3 166.7,36.3 | 166.7,36.3 163.6,36.3 SW18.1 | 168.1,36.3 v168.1,35.1 | v166.5,44.3 163.6,44.3 SW16.1 163.5,44.3 162.2,44.3 161.1,45.4 v160.2,45.4 | v170,44.3 171.4,44.3 SW16.2 171.5,44.3 178,44.3 SW17.1 178.1,44.3 179.2,44.3 v179.7,43.8 | v183.9,45 184.6,44.3 185.9,44.3 SW17.2 | v166.7,36.7 166.7,36.3 | v147.6,34.9 147.6,29.4 147,28.8 147,27.4 IC5.12 147,27.3 147,26.3 147.1,26.2 v148.5,26.2 | 167.3,22.8 171.4,22.8 SW20.1 171.5,22.8 172.8,22.8 173.5,22.1 173.5,19.5 C21.1 173.5,19.4 173.5,18.3 174.7,17.1 SW22.C 174.8,17 176.1,18.3 176.1,19.4 C22.1 176.1,19.5 176.1,20.9 176.2,21 176.2,22.1 176.9,22.8 178,22.8 SW21.2 178.1,22.8 185.4,22.8 SW21.1 185.9,22.8 185.5,22.8 v185.5,24.7
  Top 0.25: 167.3,22.8 163.6,22.8 SW20.2 163.5,22.8 162.2,22.8 v160.3,24.7 | 167.3,22.8 v167.3,22.5 | CLARIFIER.5 121.9,5.3 124.3,7.7 129.4,7.7 131.8,5.3 CLARIFIER.4 | RF-POWER.1 109.4,12.8 109.4,17.2 SW12.2 | v167.3,13.1 166,13.1 C34.- 166,12.7 165.9,12.6 162.5,12.6 160.7,10.8 | 134.3,28.7 134.3,27.4 IC5.2 134.3,27.3 v134.3,25.6 | 134.3,28.7 134.3,28.8 132.5,30.6 C23.1 129.1,30.6 v128.9,30.8 | 135.5,28.7 135.6,28.6 135.6,27.4 IC5.3 | 134.3,28.7 135.5,28.7 | v137,32.5 137,30.2 135.5,28.7 | 154.7,10.9 153.6,10.9 IC4.5 | 154.7,10.9 154.8,11 154.8,11.5 154.7,11.6 153.6,11.6 IC4.4 153.5,11.6 152.4,11.6 152.3,11.7 152.3,12.1 152.4,12.2 | 154.7,10.9 159.4,10.9 IC4.24 159.5,10.9 160.6,10.9 160.7,10.8 | 152.4,12.2 153.5,12.2 IC4.3 | 157.9,7.7 159.4,7.7 IC4.19 159.5,7.7 160.6,7.7 160.7,7.8 160.7,10.8 | 157.9,7.7 153.6,7.7 IC4.10 | 157.9,7.7 157.9,3 R16.1 | 115.6,16.3 115.6,11 R6.2 | 115.6,16.3 116.6,17.3 117.9,17.3 SW12.1 118,17.3 121.5,17.3 SW13.2 121.6,17.3 129.4,17.3 SW13.1 129.5,17.3 133,17.3 SW14.2 | C14.1 157.9,17.1 157.7,17.3 152.8,17.3 SW15.1 | v133.5,19.3 133.5,17.3 133.1,17.3 SW14.2 | SW14.2 133.6,17.3 140.9,17.3 SW14.1 141,17.3 144.7,17.3 SW15.2 144.8,17.3 152.7,17.3 SW15.1 | 152.4,12.2 152.4,17.2 SW15.1 | SW12.2 110.1,17.3 114.5,17.3 115.5,16.3 115.6,16.3
  Bottom 0.25: C2.1 28.6,35.2 26,37.8 24.5,37.8 24.2,38.1 T1.3 24.2,39.5 v24.2,41.2 | DISPLAY1.GND@3 | IC7.4 | 8,37.5 v8,39.8 | 8,37.5 8.1,37.4 C16.1 10.9,37.4 12.1,36.2 12.1,33.5 IC7.4 | X2.2 3.6,34.7 5.1,34.7 7.9,37.5 8,37.5 | v3.5,24.6 3.5,23.5 3.6,23.4 5,23.4 C18.2 | v12.5,31.6 12.1,32 12.1,33.3 IC7.4 | v35.2,24.1 36,24.9 36,25.9 36.9,26.8 39.4,26.8 DISPLAY1.GND@3 | 49.4,42.6 48.2,43.8 47,43.8 R29.1 46.9,43.8 42.5,43.8 40.9,45.4 39.5,45.4 DISPLAY1.GND@6 39.5,45.5 | 49.4,42.6 49.4,41.6 49.5,41.5 U2.9 49.5,40.1 49.5,38.8 v50.1,38.2 | v47.1,35.3 45.9,36.5 45.9,37.8 U2.11 | v55.6,45.9 56.1,45.4 56.1,44 R23.1 56.1,43.9 56.1,42.8 56.25,42.65 | v61.9,38.6 60.1,38.6 60.1,37.9 U2.12 60.1,38.7 60.1,39.2 60,39.3 60,39.9 58.2,41.7 57.2,41.7 56.25,42.65 | v48.6,25.1 49.1,25.1 51.4,27.4 C35.1 53.9,27.4 55.15,26.15 | 55.1,24 IC9.4 | 55.15,26.15 55.7,26.7 55.7,28 IC9.6 | 55.15,26.15 55,26 55,24 IC9.4 | 59.8,22.6 58.6,22.6 58.5,22.5 55.1,22.5 55,22.6 55,23.9 IC9.4 | 59.8,22.6 59.9,22.5 59.9,21.2 U1.12 59.9,21.1 59.9,19.8 60,19.7 61.2,19.7 61.8,20.3 63.2,20.3 63.5,20 63.5,18.9 U1.2 63.5,18.7 63.5,17.5 63.1,17.1 v62.5,17.1 | v61.2,25.6 61.2,24 59.8,22.6 | 49.4,42.6 56.2,42.6 56.25,42.65 | v45.3,25.4 43.9,26.8 39.6,26.8 DISPLAY1.GND@3 | 55.5,5.3 61.8,5.3 SQUELCH.5 | 55.5,5.3 51.9,5.3 VOLUME.4 | C13.1 94.1,16.8 94,16.9 v92.8,16.9 | SWR/CAL.1 89.3,12.7 89.3,10.7 90.5,9.5 90.5,6.6 91.8,5.3 SWR/CAL.4 91.9,5.2 92.8,4.3 97.1,4.3 98,5.2 101.8,5.2 RF-POWER.5 | 84.8,24 IC1.22 | 84.8,24 83.5,22.7 83.5,21.7 83.4,21.6 C5.1 | C6.1 83.4,27.6 v83.6,27.8 83.4,27.5 84.8,26.1 84.8,24 | v78.6,13.4 78.3,13.1 77.4,13.1 77.3,13.2 77.3,14.4 C3.- 77.3,14.5 77.3,15.8 77.2,15.9 v77.2,16.9
  Bottom 0.25: v74.1,19 74.1,21.1 U1.11 74.1,21.2 74.1,22.5 74.2,22.6 v74.2,24.9 | v80.5,9.2 81.8,7.9 81.8,5.3 SWR/CAL.5 | v69.9,16.1 69.9,14.1 69.4,13.6 69.4,12.8 SQUELCH.1 | v168.1,35.1 169.5,35.1 169.6,35 C19.1 C33.- 167.4,30.5 167.3,30.4 v167.3,22.5 | 154.5,45.5 DISPLAY1.GND@7 154.6,45.4 v160.2,45.4 | T5.C 166.3,45 166.8,44.5 166.8,44.3 | 166.8,44.3 166.8,44 166.9,43.9 R10.1 166.9,42.4 166.9,41.1 167,41 167,40.1 167.1,40 | 166.8,44.3 v166.5,44.3 166.9,44.5 169.3,44.5 169.5,44.7 169.6,44.7 | 167.1,40 167.2,39.9 IC2.4 | 169.6,44.7 v170,44.3 | C20.1 169.6,44.7 | 183.55,45.35 184.1,45.9 185.5,45.9 R20.1 | 183.55,45.35 183.2,45 T6.C 179.7,45 v179.7,43.8 | 183.55,45.35 v183.9,45 | v166.7,36.7 166.7,39.6 167.1,40 | v147.6,34.9 147.6,37.1 U3.11 | v148.5,26.2 152.5,26.2 153.1,26.8 DISPLAY1.GND@0 154.6,26.8 158.2,26.8 v160.3,24.7 | v185.5,24.7 185.5,24.9 185.8,25.2 185.8,26.5 T4.3 185.8,26.7 185.8,27.9 185.7,28 185.2,28 184.9,28.3 184.9,29.5 R31.2 | C8.1 105.6,28.8 IC1.53 100.6,28.8 100.5,28.7 100.5,22.4 | IC1.61 100.5,22.4 | 100.5,22.4 100.4,22.4 100.2,22.2 100.2,21 100.4,20.8 IC1.63 103.2,20.8 104.5,19.5 105.6,19.5 | C7.1 108.4,20 108.3,19.9 107.1,19.9 106.8,19.6 105.7,19.6 105.6,19.5 | 105.6,19.5 105.6,18.5 R30.1 105.6,18.4 105.6,17.1 105.4,16.9 v105,16.9 | RF-POWER.1 109.4,12.7 111.8,10.3 111.8,5.3 RF-POWER.4 111.9,5.3 121.8,5.3 CLARIFIER.5 | SW22.GND@3 168.2,9.9 168.2,8.3 168.6,7.9 169.9,7.9 SW22.GND@7 | 170,8 SW22.GND@7 | SW22.GND@7 170.1,7.9 171.4,7.9 171.7,8.2 171.7,8.5 171.8,8.6 SW22.GND@4 | v167.3,13.1 167.6,13.1 168.6,12.1 170,12.1 SW22.GND@8 170.1,12.1 171.4,12.1 171.7,11.8 171.7,11.5 171.8,11.4 171.8,10.1 SW22.GND@4
  Bottom 0.25: 171.9,10 SW22.GND@4 | SW22.GND@2 | 179.5,12.1 SW22.GND@6 | 179.5,8 SW22.GND@5 179.6,7.9 180.9,7.9 181.4,8.4 SW22.GND@1 | SW22.GND@6 179.6,12.1 180.9,12.1 181.2,11.8 181.2,11.5 181.3,11.4 181.3,10.1 SW22.GND@1 | SW22.GND@2 177.7,10.1 177.7,11.7 178.1,12.1 179.4,12.1 SW22.GND@6 | LOCH2.B3,0 187.2,4.8 185.1,4.8 181.3,8.6 SW22.GND@1 | 181.4,10 SW22.GND@1 | SW22.GND@2 SW22.GND@4 | U3.12 133.4,37.1 133.4,36.4 133.5,36.3 136.7,36.3 137,36 137,34.9 U3.2 137,34.7 v137,32.5 | 126.9,31.8 IC8.16 125.7,31.8 124.5,31.8 123.9,31.2 123.9,30 IC8.17 123.9,29.8 123.9,28.7 123.8,28.6 123.5,28.6 123.4,28.7 123.4,29.8 IC8.18 123.4,31 123.3,31.1 122.9,31.1 | 126.9,31.8 127,31.9 127,32.2 126.9,32.3 IC8.15 | 122.9,31.1 IC8.19 | 122.9,31.1 122.9,31.2 122.8,31.3 122.7,31.3 122.4,31 IC8.20 | 126.9,31.8 127.9,31.8 v128.9,30.8 | v133.5,19.3 133.5,20.6 133.6,20.7 D4.A 134.3,20.8 v134.3,25.6 | SW22.C 174.8,17 174.8,15.5 178.1,12.2 SW22.GND@2 | 55.5,5.3 v55.5,10
N$1  (via drill 0.25)
  Route3 0.127: v110.3,29.8 109.6,30.5 109.6,30.9 109.1,31.4 109.1,33.1 107.9,34.3 107.5,34.3 107.1,34.7 106.7,34.7 v106,35.4
  Bottom 0.127: v110.3,29.8 110.7,30.2 112.8,30.2 114.6,28.4 117.4,28.4 117.6,28.6 117.8,28.6 117.9,28.7 117.9,29.8 IC8.29 | v106,35.4 106.6,36 106.6,36.9 105,38.5 103.6,38.5 103.3,38.8 101.9,38.8 101.6,39.1 100.2,39.1 99.9,39.4 98.5,39.4 98.2,39.7 96.8,39.7 96.5,40 95.1,40 94.8,40.3 93.4,40.3 93.1,40.6 91.7,40.6 91.4,40.9 90,40.9 89.7,41.2 88.3,41.2 88,41.5 86.6,41.5 86.3,41.8 84.9,41.8 84.6,42.1 83.2,42.1 82.9,42.4 81.5,42.4 81.2,42.7 79.8,42.7 79.5,43 78.1,43 77.8,43.3 76.4,43.3 76.1,43.6 74.7,43.6 74.4,43.9 73,43.9 72.7,44.2 71.3,44.2 71,44.5 69.6,44.5 69.3,44.8 67.9,44.8 67.6,45.1 66.2,45.1 65.5,45.8 DISPLAY1.SEG01
N$2  (via drill 0.25)
  Top 0.127: v57.5,34.9 57.5,33.8 v54.2,30.5
  Route3 0.127: v54.2,30.5 54.2,30 50.1,25.9 50.1,22.7 49.8,22.4 v49.8,20.5
  Bottom 0.127: v57.5,34.9 57.5,40.1 U2.1 | v49.8,20.5 50.1,20.2 50.1,16.1 46.8,12.8 VOLUME.2
N$3  (via drill 0.25)
  Route3 0.127: v50.4,22.2 50.4,25.8 v55.1,30.5
  Bottom 0.127: v50.4,22.2 50.4,16 49.4,15 49.4,12.8 VOLUME.1 | v55.1,30.5 55.1,31.9 55.8,32.6 55.8,33.5 56.7,34.4 56.7,38.6 56.5,38.8 56.5,40.1 U2.2
N$4  (via drill 0.25)
  Route3 0.127: v53.3,30.5 53.3,29.5 49.8,26 49.8,22.8 49.5,22.5 49.5,21 v48.9,20.4
  Bottom 0.127: v53.3,30.5 55.5,32.7 55.5,40.1 U2.3 | v48.9,20.4 49.8,19.5 49.8,16.2 47.7,14.1 45.6,14.1 44.3,12.8 VOLUME.3
N$5
  Bottom 0.127: R4.1 132,17.6 133,17.6 133.3,17.3 D4.C 135.4,17.3 135.5,17.4 135.5,18.5 135.8,18.8 135.8,20.3 135.9,20.4 137,20.4 R5.2
N$6  (via drill 0.25)
  Route2 0.127: v54.5,32.5 54.5,31.9 56.1,30.3 v56.1,20.9
  Bottom 0.127: v54.5,32.5 54.5,40.1 U2.4 | v56.1,20.9 58.3,18.7 59.3,18.7 63,15 63,11.5 63.1,11.4 65.6,11.4 66.9,12.7 SQUELCH.2
N$7
  Bottom 0.127: R2.1 65.6,15.2 65.6,14 64.4,12.8 SQUELCH.3
N$8  (via drill 0.25)
  Top 0.127: v56.1,34.6 55.9,34.8 55,34.8 54.7,34.5 53.9,34.5 51,31.6 v51,31.2 | v48.8,28.5 48.8,28.3 48.4,27.9 C32.2 45.6,27.9 45.5,27.8 v45.5,26.4 | v64,14.2 v67,14.2 70.2,14.2 73.4,11 73.4,8.5 73.6,8.3 v73.6,7.9 | v130.5,20.4 127.8,17.7 123.2,17.7 122.4,18.5 v122.1,18.5 | v111.1,10.1 v113.7,10.1 | v111.1,7.2 110.8,7.5 107.1,7.5 105.6,6 v105.6,5.6 | v93.9,6.6 93,7.5 82.8,7.5 v82.5,7.2
  Route2 0.127: v51,31.2 50.3,30.5 49.9,30.5 48.8,29.4 v48.8,28.5 | v82.5,7.2 81.2,7.2 80.5,7.9 v73.6,7.9
  Route3 0.127: v64,14.2 62.8,14.2 62.5,13.9 60.1,13.9 v57.7,16.3
  Bottom 0.127: v56.1,34.6 55.8,34.9 55.8,38.9 56,39.1 56,41.3 55.7,41.6 54.1,41.6 53.5,41 U2.5 | v67,14.2 68.3,14.2 68.4,14.3 68.4,15.2 R2.2 | v57.7,16.3 57.7,17.3 57.3,17.7 57.3,18.9 56.2,20 55.8,20 55.4,20.4 55,20.4 54.6,20.8 54.6,21.7 53.5,22.8 49.3,22.8 49,22.5 48.6,22.5 48.2,22.9 48.2,24.1 45.9,26.4 v45.5,26.4 | v130.5,20.4 132,20.4 R4.2 | v122.1,18.5 122.1,18.1 114.1,10.1 v113.7,10.1 | v111.1,10.1 111.4,9.8 111.4,7.5 v111.1,7.2 | v105.6,5.6 104,7.2 95.4,7.2 94.8,6.6 v93.9,6.6
N$9  (via drill 0.25)
  Top 0.127: v101.6,15 104.6,15 106.8,12.8 RF-POWER.2
  Route2 0.127: v101.6,15 94.3,22.3 87.2,22.3 85.3,24.2 85.1,24.2 75.7,33.6 75.7,34 74.8,34.9 74.8,35.3 74.4,35.7 73.9,35.7 v73.3,35.1
  Route3 0.127: v65,34 53.2,34 v52.3,34.9
  Bottom 0.127: v73.3,35.1 70.9,32.7 66.3,32.7 v65,34 | v52.3,34.9 52.8,35.4 52.8,38.5 52.5,38.8 52.5,40.1 U2.6
N$10
  Bottom 0.127: R5.1 137,17.6 135.9,17.6 135.8,17.5 135.8,16.3 132.3,12.8 129.4,12.8 CLARIFIER.1
N$11  (via drill 0.25)
  Top 0.127: v123.5,18.3 123,18.3 122.7,18.6 122.7,18.7 120.7,20.7 120.4,20.7 119.2,21.9 119.2,27.5 118.4,28.3 110.1,28.3 v109.8,28 | v107,30 106.4,29.4 105.5,29.4 104.3,30.6 103.7,30.6 101.3,33 97.6,33 97.1,33.5 96.7,33.5 96.4,33.8 94.7,33.8 92.6,35.9 88.9,35.9 87.3,37.5 86.3,37.5 86,37.8 84.5,37.8 84.4,37.7 84.1,37.7 82.3,39.5 79.5,39.5 78.4,40.6 73.3,40.6 73,40.9 70.4,40.9 67.2,37.7 v67.2,36.9
  Route2 0.127: v109.8,28 109,28 v107,30
  Route3 0.127: v67.2,36.9 66.8,37.3 58.1,37.3 55.5,39.9 52.5,39.9 v51.3,38.7
  Bottom 0.127: v123.5,18.3 123.5,16.9 126.8,13.6 126.8,12.8 CLARIFIER.2 | v51.3,38.7 51.4,38.7 51.5,38.8 51.5,40.1 U2.7
N$12
  Top 0.127: R6.1 118.4,11 118.4,12.2 118.9,12.7 124.3,12.7 CLARIFIER.3
N$13  (via drill 0.25)
  Top 0.127: v82.9,31.8 83,31.9 83,34.9 IC3.6 | v76.2,10.2 76.2,9.8 77.5,8.5 LED07.C
  Route3 0.127: v82.9,31.8 82.9,24.4 v81.5,23
  Bottom 0.127: v81.5,23 81,23 79.4,21.4 79.4,18.2 78.8,17.6 76.9,17.6 76.2,16.9 v76.2,10.2
N$14  (via drill 0.25)
  Top 0.127: v63.8,6.8 63.8,7.2 v63,8 | v60.6,14.8 v60.6,13.2
  Route2 0.127: v55.2,21 55.8,21.6 55.8,27 52.7,30.1 v52.7,31.9
  Route3 0.127: v78.9,2.7 78.6,2.4 75.5,2.4 v75.2,2.7
  Bottom 0.127: v78.9,2.7 80.7,2.7 83,0.4 95.6,0.4 95.6,1.5 R7.2 | v75.2,2.7 74.3,3.6 70.5,3.6 68.1,6 65,6 64.2,6.8 v63.8,6.8 | v63,8 63,8.4 60.9,10.5 60.9,12.9 v60.6,13.2 | v60.6,14.8 57.6,17.8 57.6,19 56.3,20.3 55.9,20.3 v55.2,21 | v52.7,31.9 54.2,33.4 54.2,37.9 53,39.1 53,41.3 52.4,41.9 51.2,41.9 50.5,41.2 U2.8
N$15
  Bottom 0.127: R7.1 98.4,1.5 98.4,2.7 97.2,3.9 90.6,3.9 90.1,4.4 90.1,9.4 86.8,12.7 SWR/CAL.2
N$16  (via drill 0.25)
  Route3 0.127: v110.2,30.7 109.4,31.5 109.4,33.2 108,34.6 107.6,34.6 v106.9,35.3
  Bottom 0.127: v110.2,30.7 110.4,30.5 112.9,30.5 114.7,28.7 117.3,28.7 117.4,28.8 117.4,29.8 IC8.30 | v106.9,35.3 106.9,37 105.1,38.8 103.7,38.8 103.4,39.1 102,39.1 101.7,39.4 100.3,39.4 100,39.7 98.6,39.7 98.3,40 96.9,40 96.6,40.3 95.2,40.3 94.9,40.6 93.5,40.6 93.2,40.9 91.8,40.9 91.5,41.2 90.1,41.2 89.8,41.5 88.4,41.5 88.1,41.8 86.7,41.8 86.4,42.1 85,42.1 84.7,42.4 83.3,42.4 83,42.7 81.6,42.7 81.3,43 79.9,43 79.6,43.3 78.2,43.3 77.9,43.6 76.5,43.6 76.2,43.9 74.8,43.9 74.5,44.2 73.1,44.2 72.8,44.5 71.4,44.5 71.1,44.8 69.7,44.8 69.4,45.1 68,45.1 67.3,45.8 DISPLAY1.SEG02
N$17  (via drill 0.25)
  Top 0.127: v51,25.6 51.1,25.7 51.8,25.7 52.3,26.2 52.3,27.4 IC6.14 | v47.6,23.7 44,23.7 43.9,23.6 39.6,23.6 v39.3,23.3 | v34.6,21.5 33.7,22.4 32.9,22.4 32.6,22.7 21.9,22.7 v21.6,23
  Route2 0.127: v51,25.6 50.1,25.6 48.2,23.7 v47.6,23.7
  Bottom 0.127: 16.4,22.4 11.4,22.4 11.4,23.5 R8.1 | 16.4,22.4 16.4,23.5 R9.2 | v39.3,23.3 38.9,23.3 38.5,22.9 37.3,22.9 36.2,21.8 34.9,21.8 v34.6,21.5 | v21.6,23 21,22.4 16.4,22.4
N$18  (via drill 0.25)
  Top 0.127: X5.2 55.1,3.4 53.2,5.3 53.2,6.5 51.6,8.1 40.1,8.1 39.8,7.8 34.2,7.8 33.9,8.1 33.9,20 v34.5,20.6
  Route3 0.127: v34.5,20.6 35.2,21.3 35.2,21.7 34.2,22.7 33.4,22.7 v32.9,23.2
  Bottom 0.127: 8.6,24.9 7.3,26.2 5,26.2 C18.1 | 8.6,24.9 8.6,23.5 R8.2 | v32.9,23.2 32.6,22.9 23.3,22.9 22.1,24.1 22.1,26.7 21.7,27.1 15.5,27.1 13.3,24.9 8.6,24.9
N$19  (via drill 0.25)
  Top 0.127: SW05.4 23.6,30.3 31.4,30.3 SW05.3 31.5,30.3 32.8,30.3 33.9,31.4 v34.6,31.4 | v40.3,31.7 40.4,31.8 49.3,31.8 49.8,32.3 49.8,32.8 51.3,34.3 52.5,34.3 53.6,35.4 53.6,36.6 IC6.10
  Bottom 0.127: v40.3,31.7 40,32 35.2,32 v34.6,31.4
N$20  (via drill 0.25)
  Top 0.127: v48.7,38.6 47.2,38.6 46.7,39.1 43.3,39.1 40.9,41.5 37.4,41.5 v37.1,41.8 | v35.5,41.8 35.5,42.2 32.9,44.8 29.7,44.8 29.4,45.1 v28.9,45.1
  Route2 0.127: v62.6,25.2 62.6,25.6 50.7,37.5 49.8,37.5 v48.7,38.6
  Bottom 0.127: v62.6,25.2 63,25.2 64.5,23.7 64.5,18.9 U1.3 | v35.5,41.8 v37.1,41.8 | v28.9,45.1 28.4,45.1 27.9,45.6 T1.4
N$21  (via drill 0.25)
  Route3 0.127: v112.3,31.1 112.3,31.5 110.7,33.1 109.9,33.1 v107.8,35.2
  Bottom 0.127: v112.3,31.1 112.7,31.1 114.8,29 116.8,29 116.9,29.1 116.9,29.8 IC8.31 | v107.8,35.2 107.8,36.5 105.2,39.1 103.8,39.1 103.5,39.4 102.1,39.4 101.8,39.7 100.4,39.7 100.1,40 98.7,40 98.4,40.3 97,40.3 96.7,40.6 95.3,40.6 95,40.9 93.6,40.9 93.3,41.2 91.9,41.2 91.6,41.5 90.2,41.5 89.9,41.8 88.5,41.8 88.2,42.1 86.8,42.1 86.5,42.4 85.1,42.4 84.8,42.7 83.4,42.7 83.1,43 81.7,43 81.4,43.3 80,43.3 79.7,43.6 78.3,43.6 78,43.9 76.6,43.9 76.3,44.2 74.9,44.2 74.6,44.5 73.2,44.5 72.9,44.8 71.5,44.8 71.2,45.1 69.8,45.1 69.1,45.8 DISPLAY1.SEG03
N$22  (via drill 0.25)
  Top 0.127: v108.7,35.1 v110.1,33.7
  Bottom 0.127: v110.1,33.7 110.5,33.7 114.4,29.8 116.3,29.8 IC8.32 | v108.7,35.1 108.7,36 105.3,39.4 103.9,39.4 103.6,39.7 102.2,39.7 101.9,40 100.5,40 100.2,40.3 98.8,40.3 98.5,40.6 97.1,40.6 96.8,40.9 95.4,40.9 95.1,41.2 93.7,41.2 93.4,41.5 92,41.5 91.7,41.8 90.3,41.8 90,42.1 88.6,42.1 88.3,42.4 86.9,42.4 86.6,42.7 85.2,42.7 84.9,43 83.5,43 83.2,43.3 81.8,43.3 81.5,43.6 80.1,43.6 79.8,43.9 78.4,43.9 78.1,44.2 76.7,44.2 76.4,44.5 75,44.5 74.7,44.8 73.3,44.8 73,45.1 71.6,45.1 70.9,45.8 DISPLAY1.SEG04
N$23  (via drill 0.25)
  Top 0.127: v82,31.8 82.3,32.1 82.3,34.9 IC3.7 | v77.2,5.7 77.4,5.5 LED08.C
  Route3 0.127: v82,31.8 82.6,31.2 82.6,24.5 81.7,23.6 81.3,23.6 76.6,18.9 76.6,17.3 75.6,16.3 v75.6,16
  Bottom 0.127: v75.6,16 75.9,15.7 75.9,11 74.6,9.7 74.6,7.3 76.2,5.7 v77.2,5.7
N$24
  Bottom 0.127: R12.2 31.5,43.9 30.3,43.9 28.9,42.5 28.9,40.9 28.8,40.8 28.8,39.5 T1.1
N$25  (via drill 0.25)
  Top 0.127: v95.5,16 97.8,16 98.4,15.4 98.8,15.4 104.3,9.9 v104.3,9.5 | v104.3,7.8 104.6,8.1 111.6,8.1 114.1,5.6 114.1,4.4 115.1,3.4 X3.4 | C30.1 55.6,15.3 v57,15.3 | v80.8,6.8 80.8,7.2 81.4,7.8 93.1,7.8 93.7,7.2 v94.6,7.2
  Bottom 0.127: IC1.8 94.4,17 94.6,16.8 95.2,16.8 95.5,16.5 v95.5,16 | v104.3,9.5 v104.3,7.8 104,7.5 94.9,7.5 v94.6,7.2 | v57,15.3 59.3,15.3 61.2,13.4 61.2,10.6 65.2,6.6 73.7,6.6 73.9,6.4 75.1,6.4 76.1,5.4 76.7,5.4 77,5.1 79.1,5.1 v80.8,6.8
N$26  (via drill 0.25)
  Top 0.127: v115.5,33.2 114.6,32.3 112.4,32.3 v109.6,35.1
  Bottom 0.127: v115.5,33.2 115.5,32.8 115,32.3 IC8.34 | v109.6,35.1 109.6,35.5 105.4,39.7 104,39.7 103.7,40 102.3,40 102,40.3 100.6,40.3 100.3,40.6 98.9,40.6 98.6,40.9 97.2,40.9 96.9,41.2 95.5,41.2 95.2,41.5 93.8,41.5 93.5,41.8 92.1,41.8 91.8,42.1 90.4,42.1 90.1,42.4 88.7,42.4 88.4,42.7 87,42.7 86.7,43 85.3,43 85,43.3 83.6,43.3 83.3,43.6 81.9,43.6 81.6,43.9 80.2,43.9 79.9,44.2 78.5,44.2 78.2,44.5 76.8,44.5 76.5,44.8 75.1,44.8 74.8,45.1 73.4,45.1 72.7,45.8 DISPLAY1.SEG05
N$27
  Bottom 0.127: Q1.2 78,30.3 80.5,30.3 80.6,30.4 C6.2 83.4,30.4 83.5,30.5 83.5,30.9 85.3,32.7 87.1,32.7 88.9,30.9 88.9,27.1 87.4,25.6 IC1.24
N$28
  Bottom 0.127: R32.2 189,21.6 187.8,21.6 187.6,21.4 187.6,20.4 187.2,20 185.3,20 184.9,20.4 T4.4
N$29
  Bottom 0.127: DISPLAY1.SEG06 74.5,45.8 75.2,45.1 76.6,45.1 76.9,44.8 78.3,44.8 78.6,44.5 80,44.5 80.3,44.2 81.7,44.2 82,43.9 83.4,43.9 83.7,43.6 85.1,43.6 85.4,43.3 86.8,43.3 87.1,43 88.5,43 88.8,42.7 90.2,42.7 90.5,42.4 91.9,42.4 92.2,42.1 93.6,42.1 93.9,41.8 95.3,41.8 95.6,41.5 97,41.5 97.3,41.2 98.7,41.2 99,40.9 100.4,40.9 100.7,40.6 102.1,40.6 102.4,40.3 103.8,40.3 104.1,40 105.5,40 112.7,32.8 114.4,32.8 IC8.35
N$30  (via drill 0.25)
  Top 0.127: v119.9,28.9 119.9,41.2 124.9,46.2 DISPLAY1.COM1
  Bottom 0.127: v119.9,28.9 119.9,29.8 IC8.25
N$31  (via drill 0.25)
  Route3 0.127: v87.8,25.2 85.1,25.2 v83.7,23.8
  Bottom 0.127: IC1.23 87.4,24.8 v87.8,25.2 | v83.7,23.8 83.7,24.1 83.4,24.4 C5.2 79.9,24.4 78,22.5 Q1.1
N$32  (via drill 0.25)
  Top 0.127: SW20.3 171.4,27.3 163.6,27.3 SW20.4 163.5,27.3 162.2,27.3 162.1,27.2 161.8,27.2 v159.3,24.7 | v140.7,30.1 138.1,32.7 IC5.20 | v149.9,24.3 v148.3,24.3
  Bottom 0.127: v140.7,30.1 142.5,30.1 144.1,28.5 144.5,28.5 148.3,24.7 v148.3,24.3 | v149.9,24.3 158.9,24.3 v159.3,24.7
N$33  (via drill 0.25)
  Top 0.127: LED06.C 57.4,5.5 56.9,6 56.9,8.6 58.2,9.9 59.7,9.9 61.4,11.6 v61.8,11.6 | v68.8,23.8 68.4,23.8 67.9,24.3 67.9,27.1 68.5,27.7 68.5,28 v69.5,29 | v73.9,33.6 74.6,34.3 77,34.3 78,33.3 79.2,33.3 79.9,34 80.6,34 81,34.4 81,34.9 IC3.9
  Route3 0.127: v61.5,14.5 62.2,15.2 62.6,15.2 68.8,21.4 v68.8,23.8
  Bottom 0.127: v61.8,11.6 61.5,11.9 v61.5,14.5 | v69.5,29 73.9,33.4 v73.9,33.6
N$34  (via drill 0.25)
  Top 0.127: v79.1,37.2 79.1,35 IC3.12 | v59.1,18.1 58.3,18.9 42.2,18.9 v41.9,18.6 | v36.8,13.5 37.1,13.2 37.1,9.5 36.6,9 LED04.C
  Route3 0.127: v79.1,37.2 79.1,35.6 71.6,28.1 70.5,28.1 61.8,19.4 60.4,19.4 v59.1,18.1
  Bottom 0.127: v36.8,13.5 v41.9,18.6
N$35  (via drill 0.25)
  Top 0.127: v79.9,37.7 79.6,38 79.1,38 78.5,37.4 78.5,36.4 78,35.9 77.9,35.9 77.8,35.8 77.8,35 IC3.14 | v28.6,36.4 28.3,36.1 23.8,36.1 23,36.9 21.4,36.9 21.3,37 LED02.C
  Route3 0.127: v64.4,42.8 64,42.8 62.3,41.1 v47.6,41.1
  Bottom 0.127: v79.9,37.7 79.4,37.7 78.8,38.3 76.8,38.3 73.3,41.8 66.2,41.8 65.2,42.8 v64.4,42.8 | v47.6,41.1 43.2,41.1 38.5,36.4 38.5,35.9 37.9,35.3 36.9,35.3 36.6,35.6 29.4,35.6 v28.6,36.4
N$36  (via drill 0.25)
  Top 0.127: v73,27.9 73,28.5 74.5,30 78.3,30 78.4,29.9 78.4,29.1 IC3.16 | v79.1,16.5 79.1,15.8 85.7,9.2 92.9,9.2 v93.2,9.5 | LED10.C v97.4,5.5
  Route2 0.127: v73,27.9 74.6,27.9 75.1,27.4 75.1,25.4 78.5,22 78.5,17.1 v79.1,16.5 | v93.2,9.5 93.4,9.5 v97.4,5.5
N$37  (via drill 0.25)
  Top 0.127: v156.8,10.2 156.7,10.3 153.6,10.3 IC4.6 | v163,20.4 163.3,20.7 164.2,20.7 v164.5,20.4 | v168.8,32.4 169.2,32.8 172.2,32.8 v173.1,31.9 | LED17.C v178.8,38
  Bottom 0.127: v156.8,10.2 156.8,10.6 157.5,11.3 158.4,11.3 159,11.9 159,16.8 162.6,20.4 v163,20.4 | v164.5,20.4 164.2,20.7 164.2,21.6 164.9,22.3 165.3,22.3 165.9,22.9 166.3,22.9 166.9,23.5 166.9,30.5 v168.8,32.4 | v173.1,31.9 173.3,31.9 176.8,35.4 178.7,35.4 178.8,35.5 v178.8,38
N$38  (via drill 0.25)
  Top 0.127: v73.6,27.2 74.2,27.8 77.7,27.8 77.8,27.9 77.8,29 IC3.15 | v78.2,16.6 78.2,16.3 85.6,8.9 93.4,8.9 94.2,9.7 96.3,9.7 97.5,8.5 LED09.C
  Route2 0.127: v73.6,27.2 73.6,26.5 78.2,21.9 v78.2,16.6
N$39  (via drill 0.25)
  Top 0.127: v70.4,39.7 75.5,34.6 77.1,34.6 78.1,33.6 78.3,33.6 78.4,33.7 78.4,34.9 IC3.13 | v27.9,37 27.3,36.4 23.9,36.4 21.3,39 LED01.C
  Route3 0.127: v63.7,40 58.8,40 58,40.8 48.1,40.8 47.8,40.5 47.4,40.5 v46.2,41.7
  Bottom 0.127: v70.4,39.7 70.1,39.4 64.3,39.4 v63.7,40 | v46.2,41.7 45.9,41.4 43.1,41.4 40.4,38.7 38.1,38.7 35.3,35.9 29.5,35.9 29.2,36.2 29.2,36.6 28.8,37 v27.9,37
N$40  (via drill 0.25)
  Top 0.127: v79.7,36.5 79.7,35 IC3.11 | v61.6,18.8 60.9,19.5 40.2,19.5 v39.9,19.2 | v36.7,18.1 36.6,18 LED03.C
  Route3 0.127: v79.7,36.5 79.7,35.8 71.7,27.8 70.6,27.8 v61.6,18.8
  Bottom 0.127: v39.9,19.2 37.8,19.2 v36.7,18.1
N$41  (via drill 0.25)
  Top 0.127: v81.1,33.7 81.6,33.7 81.7,33.8 81.7,34.9 IC3.8 | v62.1,10.5 60.1,8.5 LED05.C
  Route3 0.127: v81.1,33.7 78,33.7 72.1,27.8 72.1,24.3 v62.4,14.6
  Bottom 0.127: v62.4,14.6 62.7,14.3 62.7,11.1 v62.1,10.5
N$42  (via drill 0.25)
  Top 0.127: X5.1 78.9,3.4 80.2,4.7 80.2,7 81.3,8.1 93.6,8.1 v93.9,7.8 | v100.1,8.3 100.5,8.3 101.1,8.9 113.3,8.9 v113.6,9.2 | v148.3,31.3 148,31.6 148,34.3 154.9,41.2 v168.1,41.2
  Bottom 0.127: 172.1,38.7 171.5,38.7 171.4,38.6 168.4,38.6 IC2.3 | 172.1,38.7 172.2,38.6 173.6,38.6 IC2.6 | C20.2 172.4,44 172.3,43.9 172.3,42.5 | 169.8,41.2 169.7,41.3 169.7,42.5 R10.2 | 169.8,41.2 172.2,41.2 172.3,41.3 | 172.3,42.5 172.3,41.3 | 172.3,42.5 R17.1 | v93.9,7.8 99.6,7.8 v100.1,8.3 | v113.6,9.2 135.7,31.3 137.4,31.3 137.7,31.6 148,31.6 v148.3,31.3 | 169.8,41.2 v168.1,41.2 | 172.1,38.7 172.1,40.9 172.3,41.1 172.3,41.3
N$43
  Top 0.25: IC3.1 86.2,34.9 86.2,33.1 87.4,31.9 89.8,31.9 89.9,31.8 89.9,30.7 90,30.6 91,30.6 R3.2
N$44
  Top 0.127: IC3.25 84.3,29 84.3,27.5 83.6,26.8 83.6,26 R13.2
N$45  (via drill 0.25)
  Top 0.127: v119,28.9 119.6,29.5 119.6,38.7 v119.3,39 | v120.5,40.2 120.2,40.5 120.2,41.1 124.2,45.1 126,45.1 126.7,45.8 DISPLAY1.COM2
  Bottom 0.127: v119,28.9 119.1,28.9 119.4,29.2 119.4,29.8 IC8.26 | v120.5,40.2 v119.3,39
N$46  (via drill 0.25)
  Top 0.127: v157.4,12.8 157.4,12.1 157.9,11.6 159.4,11.6 IC4.25 | v154,18.6 154,21.3 154.1,21.4 155.5,21.4 R33.2
  Bottom 0.127: v157.4,12.8 157.8,13.2 157.8,15.2 154.4,18.6 v154,18.6
N$47  (via drill 0.25)
  Top 0.127: v153.1,14.3 152.8,14 152.8,13.5 153.5,13.5 IC4.1 | v152.5,9.6 152.5,9.3 152.2,9 152.2,8.3 151.9,8 151.9,5.3 152.7,4.5 155,4.5 155.1,4.4 155.1,3 R16.2
  Bottom 0.127: v153.1,14.3 153.1,10.2 v152.5,9.6
N$48  (via drill 0.25)
  Top 0.127: v117.9,32.6 v115.7,30.4 | v120.5,32.6 120.2,32.9 120.2,39.1 121.1,40 121.1,41.6 124.3,44.8 126.1,44.8 126.4,45.1 127.8,45.1 128.5,45.8 DISPLAY1.COM3
  Bottom 0.127: v115.7,30.4 115.8,30.5 116.1,30.5 116.5,30.9 118.9,30.9 IC8.27 | v117.9,32.6 118.2,32.3 120.2,32.3 v120.5,32.6
N$49  (via drill 0.25)
  Top 0.127: v154.9,9.6 153.6,9.6 IC4.7 | v166,23.8 166.3,23.5 169.5,23.5 174.6,28.6 174.8,28.6 175.7,29.5 LED18.C
  Bottom 0.127: v154.9,9.6 155.4,9.6 157.4,11.6 158.3,11.6 158.7,12 158.7,16.9 164.7,22.9 165.1,22.9 v166,23.8
N$50  (via drill 0.5)
  Top 0.25: v175.1,40.9 175.1,38.5 174.6,38 LED17.A v171.8,38 162.9,38 160.9,40 155.8,40 DISPLAY1.A3 | LED15.A 167.4,5.5 167.5,5.6 167.5,8.3 | 167.5,8.3 167.5,8.4 167.4,8.5 LED16.A | C34.+ 166,8.5 LED16.A | v174.7,29.5 LED18.A | v186.9,20.7 186.9,18.1 LED20.A 188.1,18 188.5,17.6 188.5,16 188,15.5 LED19.A 185.4,15.5 185.3,15.4 185.3,15.1 181.9,11.7 178.3,11.7 174.9,8.3 167.5,8.3 | 17.6,37 LED02.A | 17.6,37 17.7,37.1 17.7,38.9 17.6,39 LED01.A | 37,33.6 38.2,33.6 DISPLAY1.A2 | 37,33.6 36,33.6 | 36,33.6 20.9,33.6 17.6,36.9 17.6,37 | 37,33.6 37,38.6 38.2,39.8 38.2,40 DISPLAY1.A1 | LED06.A 56.4,5.5 56.5,5.6 56.5,8.4 56.4,8.5 | 56.4,8.5 LED05.A 40.6,8.5 40.1,9 LED04.A 37.6,9 37.5,9.1 37.5,17.9 | 37.5,17.9 37.6,18 LED03.A | LED14.A 136.9,5.5 137,5.6 137,8 | 137,8 137,8.4 136.9,8.5 LED13.A 121.2,8.5 119.9,7.2 116.5,7.2 | LED12.A 116.4,5.5 116.5,5.6 116.5,7.2 | 116.5,7.2 116.5,8.4 116.4,8.5 LED11.A 101.2,8.5 99.9,7.2 96.5,7.2 | LED10.A 96.4,5.5 96.5,5.6 96.5,7.2 | 96.5,7.2 96.5,8.4 96.4,8.5 LED09.A 81.2,8.5 79.9,7.2 76.5,7.2 | LED08.A 76.4,5.5 76.5,5.6 76.5,7.2 | 76.5,7.2 76.5,8.4 76.4,8.5 LED07.A 73.9,8.5 73.8,8.6 73.8,11.1 68.75,16.15 | 68.75,16.15 67.9,17 v66.1,17 66.1,16.9 65.3,16.1 65,16.1 63,14.1 63,13.7 59.6,10.3 58.1,10.3 56.4,8.6 56.4,8.5 | C15.+ 78.2,26 78.1,25.9 78.1,25 76,22.9 74.3,22.9 73.4,22 73.4,20.8 68.75,16.15 | 36,33.6 36,24.2 37.4,22.8 37.4,17.9 37.5,17.9 | v164.8,8.5 LED16.A | 137,8 v137.8,8
  Bottom 0.25: DISPLAY1.A4 155.7,33.6 155.7,36.1 154.7,37.1 154.7,39 155.7,40 DISPLAY1.A3 | v171.8,38 171.8,36.5 172.2,36.1 172.4,36.1 | 172.4,36.1 IC2.8 | 172.4,36.1 C19.2 C33.+ 173.7,30.5 v174.7,29.5 174.8,29.5 177.4,32.1 184.2,32.1 R18.2 184.3,32.1 185.6,32.1 186.9,30.8 v186.9,20.7 | v175.1,40.9 R17.2 | v66.1,17 65.5,17.6 U1.4 | v164.8,8.5 149.8,8.5 148.8,9.5 141.2,9.5 139.7,8 v137.8,8
N$51  (via drill 0.25)
  Top 0.127: v152.5,7.8 152.5,8.9 152.6,9 153.5,9 IC4.8 | v160.5,6.4 161.4,5.5 LED15.C
  Bottom 0.127: v152.5,7.8 152.8,8.1 158.8,8.1 v160.5,6.4
N$52
  Bottom 0.127: DISPLAY1.SEG07 76.3,45.8 77,45.1 78.4,45.1 78.7,44.8 80.1,44.8 80.4,44.5 81.8,44.5 82.1,44.2 83.5,44.2 83.8,43.9 85.2,43.9 85.5,43.6 86.9,43.6 87.2,43.3 88.6,43.3 88.9,43 90.3,43 90.6,42.7 92,42.7 92.3,42.4 93.7,42.4 94,42.1 95.4,42.1 95.7,41.8 97.1,41.8 97.4,41.5 98.8,41.5 99.1,41.2 100.5,41.2 100.8,40.9 102.2,40.9 102.5,40.6 103.9,40.6 104.2,40.3 105.6,40.3 112.6,33.3 114.4,33.3 IC8.36
N$53
  Bottom 0.127: DISPLAY1.SEG08 78.1,45.8 78.8,45.1 80.2,45.1 80.5,44.8 81.9,44.8 82.2,44.5 83.6,44.5 83.9,44.2 85.3,44.2 85.6,43.9 87,43.9 87.3,43.6 88.7,43.6 89,43.3 90.4,43.3 90.7,43 92.1,43 92.4,42.7 93.8,42.7 94.1,42.4 95.5,42.4 95.8,42.1 97.2,42.1 97.5,41.8 98.9,41.8 99.2,41.5 100.6,41.5 100.9,41.2 102.3,41.2 102.6,40.9 104,40.9 104.3,40.6 105.7,40.6 112.5,33.8 114.4,33.8 IC8.37
N$54
  Bottom 0.127: DISPLAY1.SEG09 79.9,45.8 80.6,45.1 82,45.1 82.3,44.8 83.7,44.8 84,44.5 85.4,44.5 85.7,44.2 87.1,44.2 87.4,43.9 88.8,43.9 89.1,43.6 90.5,43.6 90.8,43.3 92.2,43.3 92.5,43 93.9,43 94.2,42.7 95.6,42.7 95.9,42.4 97.3,42.4 97.6,42.1 99,42.1 99.3,41.8 100.7,41.8 101,41.5 102.4,41.5 102.7,41.2 104.1,41.2 104.4,40.9 105.8,40.9 112.4,34.3 114.4,34.3 IC8.38
N$55  (via drill 0.25)
  Top 0.127: 170.7,19.5 170.7,18.3 172,17 SW22.B | v145.7,30.7 145.7,36.6 IC5.14 | v159.4,23.8 160.7,23.8 162.3,22.2 162.3,21.8 163.1,21 170.6,21 170.7,20.9 170.7,19.5 | 170.7,19.5 C21.2
  Route2 0.127: v149.9,28.1 151.8,26.2 157.6,26.2 157.9,25.9 157.9,25.3 v159.4,23.8
  Bottom 0.127: v145.7,30.7 146,31 147.4,31 149.9,28.5 v149.9,28.1
N$56  (via drill 0.25)
  Top 0.127: v103,23.2 101.9,22.1 100.4,22.1 v99.8,22.7 | v50.2,41.7 v48.5,41.7 | v53.4,41.7 53.4,41.3 54.4,40.3 56.5,40.3 57,39.8 58.2,39.8 v58.5,39.5
  Route2 0.127: v58.5,39.5 59.1,38.9 59.3,38.9 66.9,31.3 71.8,31.3 72.4,31.9 72.8,31.9 73.2,31.5 73.2,30.9 75.1,29 75.1,28.6 76,27.7 76,25.7 80.8,20.9 82.6,20.9 82.9,21.2 84.5,21.2 v84.8,21.5
  Bottom 0.127: v103,23.2 IC1.60 | v99.8,22.7 99.8,20 100.7,19.1 100.7,16.9 97.9,14.1 97.2,14.1 96.8,13.7 90.7,13.7 90.3,14.1 89.8,14.1 | 89.8,14.1 85.6,14.1 84.3,12.8 SWR/CAL.3 | v48.5,41.7 U2.10 | v50.2,41.7 50.7,42.2 52.9,42.2 v53.4,41.7 | v84.8,21.5 84.8,21.2 85.2,20.8 85.2,19.6 85.9,18.9 86,18.9 86.8,18.1 86.8,17.1 89.8,14.1
N$57  (via drill 0.25)
  Top 0.127: v21.5,25.1 21.2,25.4 20.5,25.4 20.4,25.3 20.4,24.1 SW04.3 20.4,24 20.4,22.7 20.7,22.4 32.5,22.4 33.1,21.8 v33.5,21.8 | v21.5,26.5 21.5,29.5 20.4,30.6 20.4,31.9 SW04.4 | v50.1,31.1 50.1,32.7 51.4,34 52.6,34 53.7,35.1 54.5,35.1 54.8,35.4 54.8,36.6 IC6.9 | v48.2,29.2 46.2,29.2 44.4,27.4 44.4,24.5 43.8,23.9 38.7,23.9 v38.4,23.6
  Route2 0.127: v48.2,29.2 v50.1,31.1
  Bottom 0.127: v21.5,26.5 v21.5,25.1 | v38.4,23.6 38.1,23.6 37.7,23.2 37.2,23.2 36.1,22.1 33.8,22.1 v33.5,21.8
N$58  (via drill 0.25)
  Top 0.127: SW03.4 4.8,30.3 12.7,30.3 SW03.3 12.8,30.3 14.1,30.3 14.4,30.6 v15.2,30.6 | v51.9,33.4 52.2,33.7 52.7,33.7 53.8,34.8 54.6,34.8 54.9,35.1 55.8,35.1 56.1,35.4 IC6.8 | v49.4,35.9 47.5,35.9 47,36.4 39.4,36.4 v39.1,36.1 | v30,34.5 29.5,34 21.4,34 v21.1,34.3
  Route2 0.127: v49.4,35.9 v51.9,33.4
  Bottom 0.127: v39.1,36.1 38,35 36.8,35 36.5,35.3 30.3,35.3 30,35 v30,34.5 | v21.1,34.3 18.9,34.3 v15.2,30.6
N$59  (via drill 0.25)
  Top 0.127: SW02.3 22.1,35.8 29.9,35.8 SW02.4 30,35.8 31.3,35.8 33.1,34 35.6,34 v36.3,34.7 | v52.2,38.3 56.9,38.3 57.4,37.8 57.4,36.6 IC6.7